# EAGLE board GPIO_Block-GiantPanel-v10 (EAGLE 6.6.0), part 1 of 5
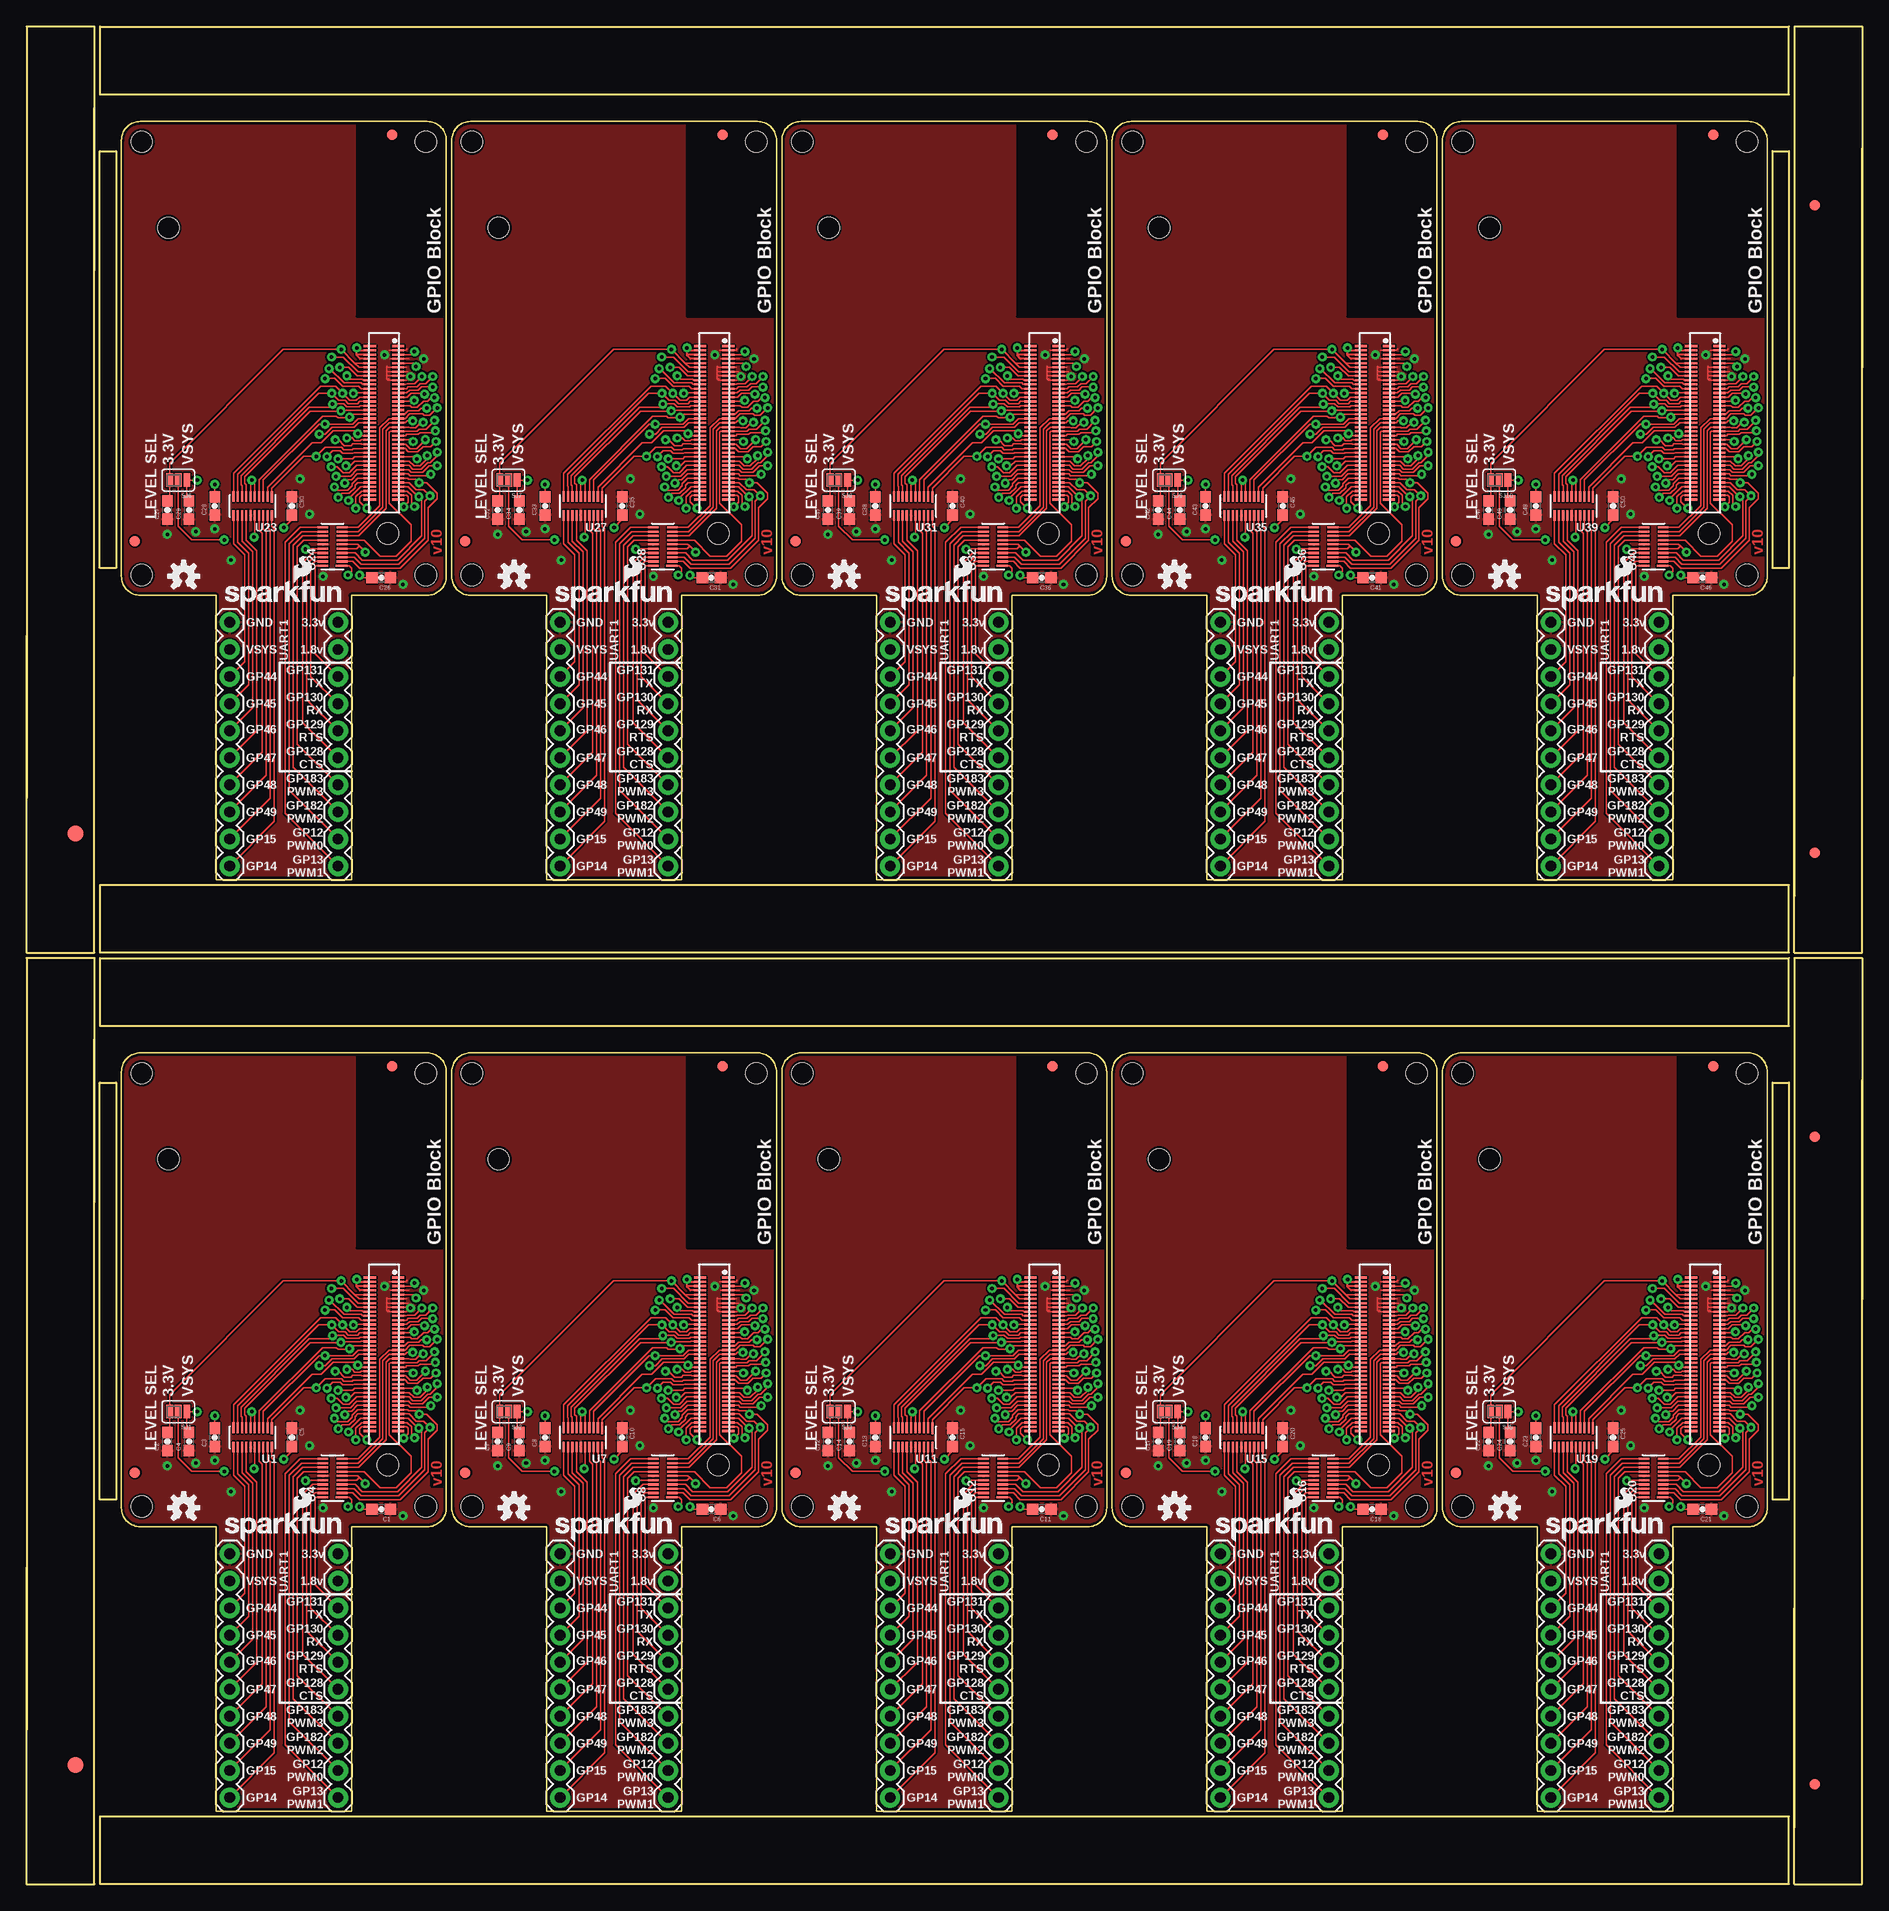
[diagram p0: board, top side]
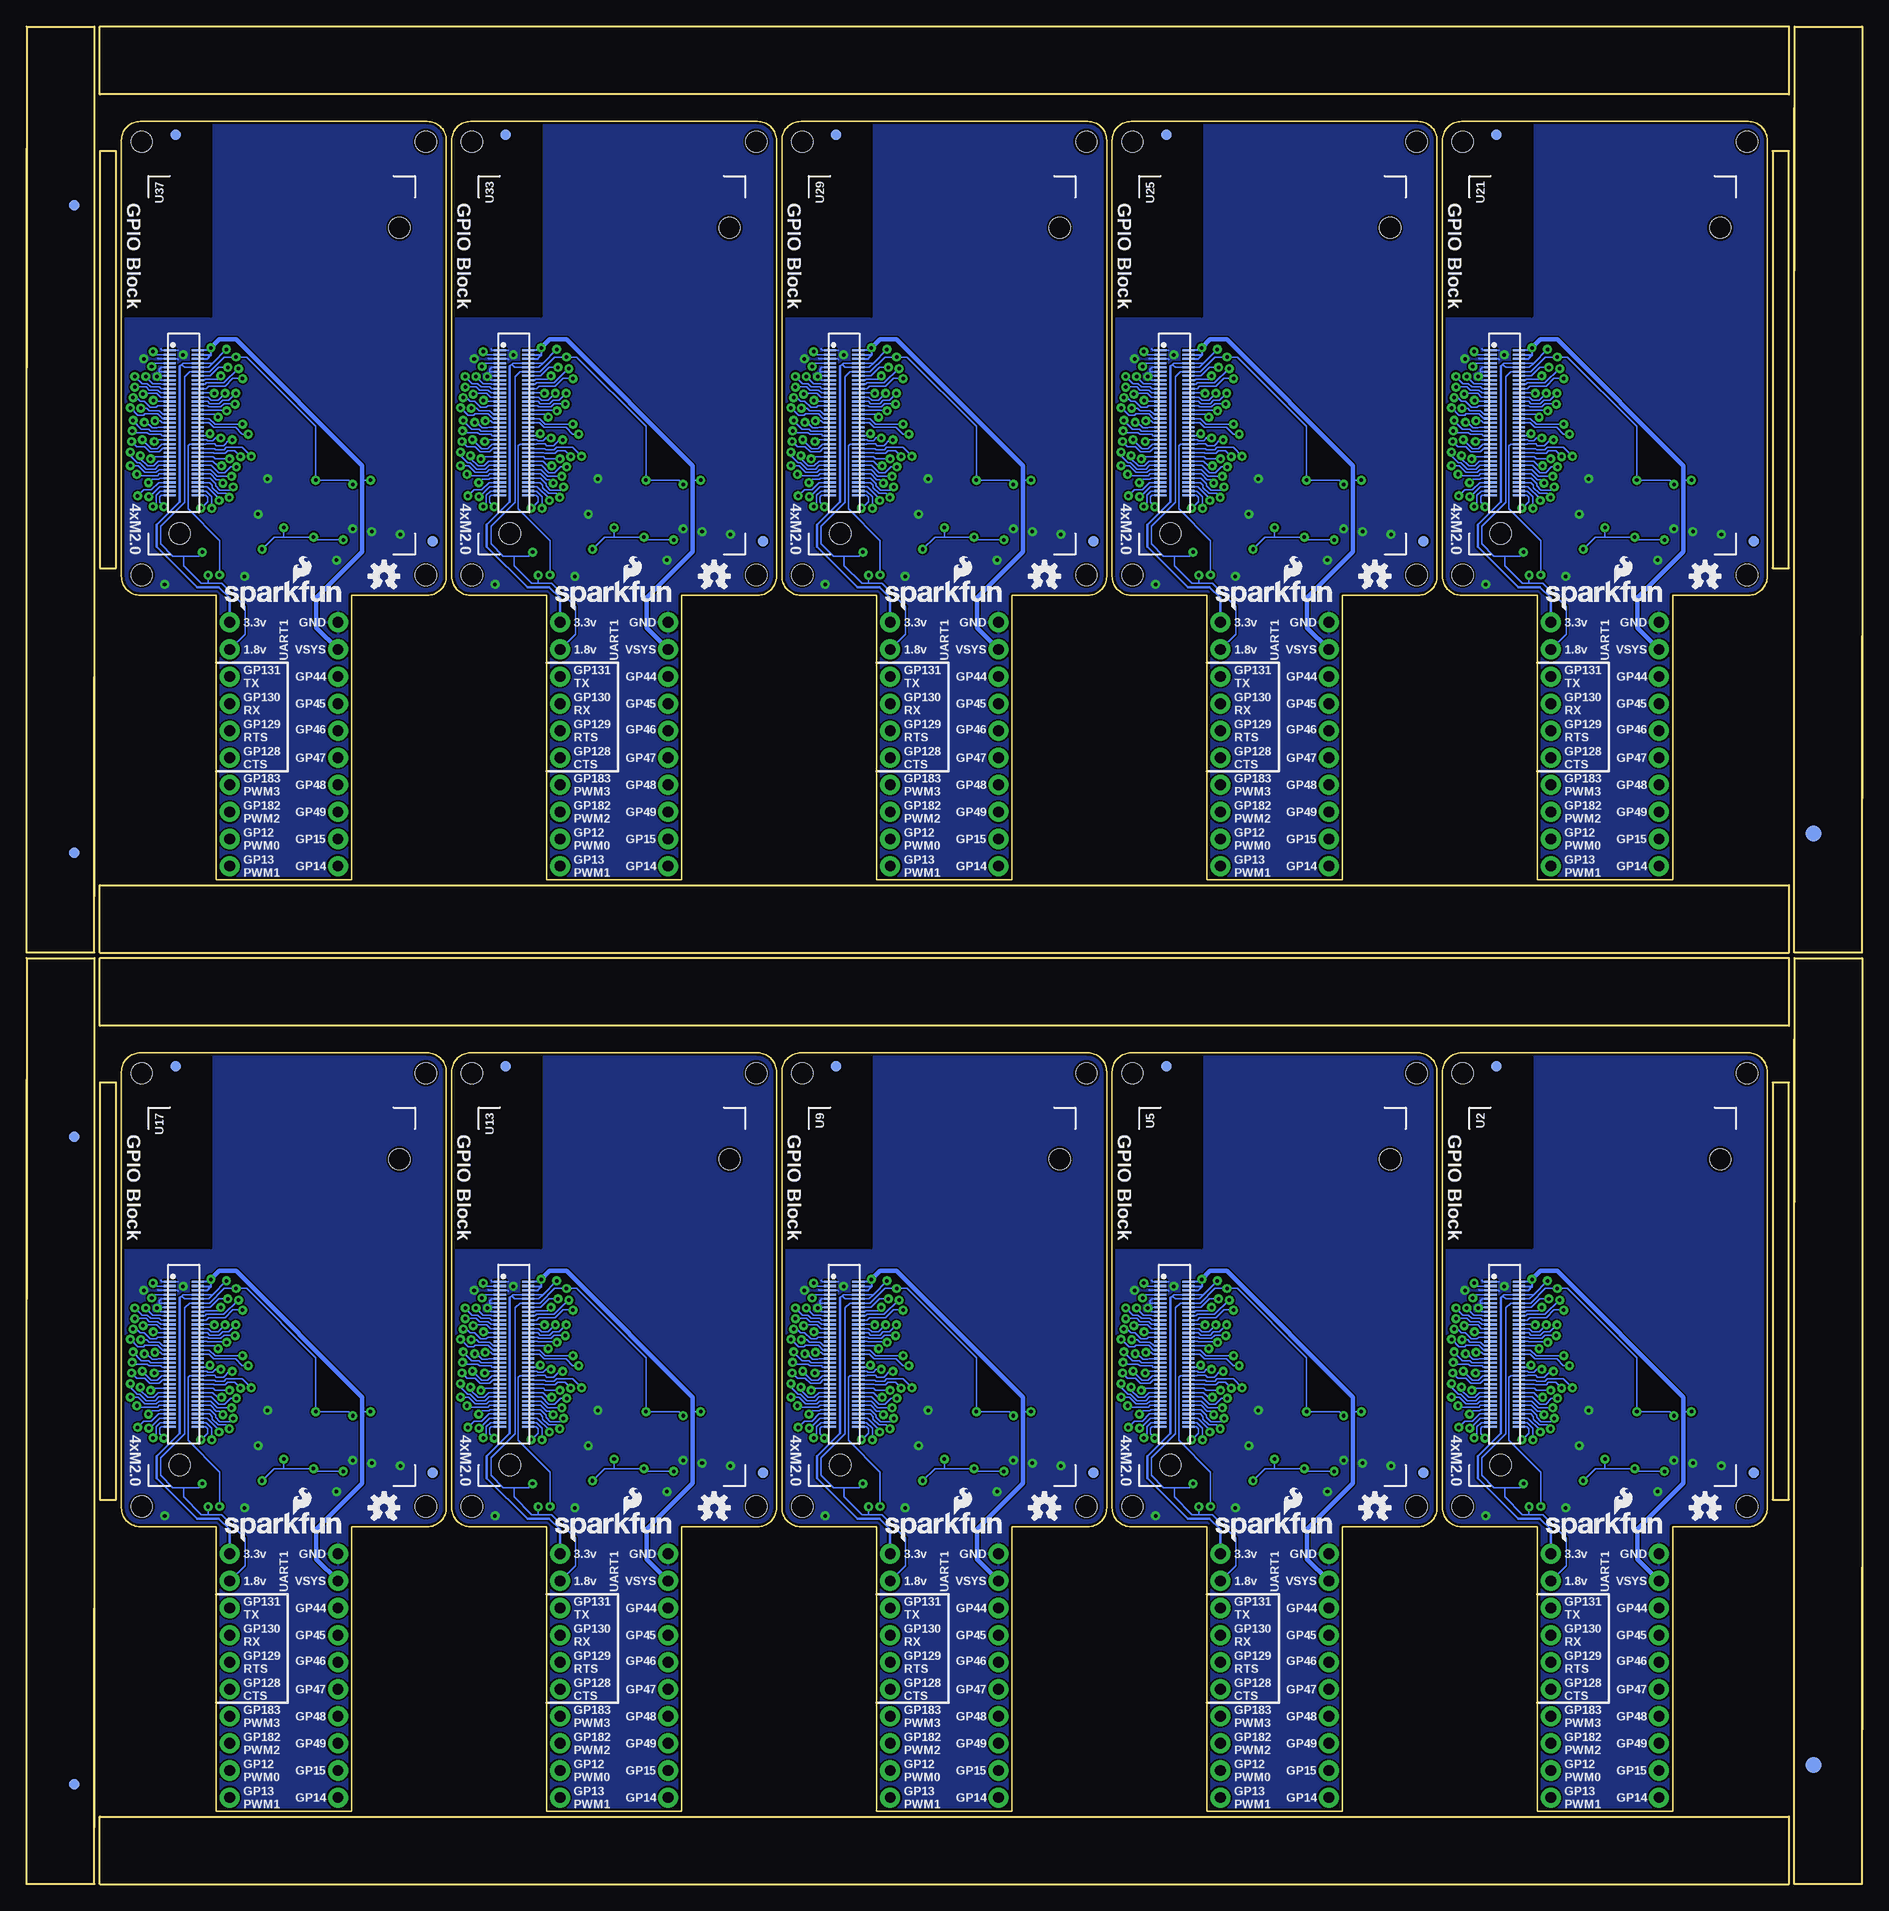
[diagram p1: board, bottom side, seen from below]

Size 172.21 x 174.24 mm. Coordinates in mm from the lower left corner, seen from the top.
Outline: 6.35,79.25 6.35,0 0,0 0,29.72
Outline: 172.21,75.44 172.21,0 165.86,0 165.86,25.91
Outline: 165.86,5.33 165.86,86.87 172.21,86.87 172.21,54.86
Outline: 0,14.48 0,86.87 6.35,86.87 6.35,64.01
Outline: 6.35,166.62 6.35,87.38 0,87.38 0,117.09
Outline: 172.21,162.81 172.21,87.38 165.86,87.38 165.86,113.28
Outline: 165.86,92.71 165.86,174.24 172.21,174.24 172.21,142.24
Outline: 0,101.85 0,174.24 6.35,174.24 6.35,151.38
Outline: 39.37,76.2 39.37,35.31 arc-90 37.59,33.53 30.48,33.53 30.48,6.86 17.78,6.86 17.78,33.53 10.67,33.53 arc-90 8.89,35.31 8.89,76.2 arc-90 10.67,77.98 37.59,77.98 arc-90 39.37,76.2
Outline: 70.36,76.2 70.36,35.31 arc-90 68.58,33.53 61.47,33.53 61.47,6.86 48.77,6.86 48.77,33.53 41.66,33.53 arc-90 39.88,35.31 39.88,76.2 arc-90 41.66,77.98 68.58,77.98 arc-90 70.36,76.2
Outline: 101.35,76.2 101.35,35.31 arc-90 99.57,33.53 92.46,33.53 92.46,6.86 79.76,6.86 79.76,33.53 72.64,33.53 arc-90 70.87,35.31 70.87,76.2 arc-90 72.64,77.98 99.57,77.98 arc-90 101.35,76.2
Outline: 132.33,76.2 132.33,35.31 arc-90 130.56,33.53 123.44,33.53 123.44,6.86 110.74,6.86 110.74,33.53 103.63,33.53 arc-90 101.85,35.31 101.85,76.2 arc-90 103.63,77.98 130.56,77.98 arc-90 132.33,76.2
Outline: 163.32,76.2 163.32,35.31 arc-90 161.54,33.53 154.43,33.53 154.43,6.86 141.73,6.86 141.73,33.53 134.62,33.53 arc-90 132.84,35.31 132.84,76.2 arc-90 134.62,77.98 161.54,77.98 arc-90 163.32,76.2
Outline: 6.86,6.35 6.86,0 165.35,0 165.35,6.35 6.86,6.35
Outline: 6.86,80.52 165.35,80.52 165.35,86.87 6.86,86.87 6.86,80.52
Outline: 6.86,36.07 6.86,75.18 8.38,75.18 8.38,36.07 6.86,36.07
Outline: 163.83,36.07 163.83,75.18 165.35,75.18 165.35,36.07 163.83,36.07
Outline: 39.37,163.58 39.37,122.68 arc-90 37.59,120.9 30.48,120.9 30.48,94.23 17.78,94.23 17.78,120.9 10.67,120.9 arc-90 8.89,122.68 8.89,163.58 arc-90 10.67,165.35 37.59,165.35 arc-90 39.37,163.58
Outline: 70.36,163.58 70.36,122.68 arc-90 68.58,120.9 61.47,120.9 61.47,94.23 48.77,94.23 48.77,120.9 41.66,120.9 arc-90 39.88,122.68 39.88,163.58 arc-90 41.66,165.35 68.58,165.35 arc-90 70.36,163.58
Outline: 101.35,163.58 101.35,122.68 arc-90 99.57,120.9 92.46,120.9 92.46,94.23 79.76,94.23 79.76,120.9 72.64,120.9 arc-90 70.87,122.68 70.87,163.58 arc-90 72.64,165.35 99.57,165.35 arc-90 101.35,163.58
Outline: 132.33,163.58 132.33,122.68 arc-90 130.56,120.9 123.44,120.9 123.44,94.23 110.74,94.23 110.74,120.9 103.63,120.9 arc-90 101.85,122.68 101.85,163.58 arc-90 103.63,165.35 130.56,165.35 arc-90 132.33,163.58
Outline: 163.32,163.58 163.32,122.68 arc-90 161.54,120.9 154.43,120.9 154.43,94.23 141.73,94.23 141.73,120.9 134.62,120.9 arc-90 132.84,122.68 132.84,163.58 arc-90 134.62,165.35 161.54,165.35 arc-90 163.32,163.58
Outline: 6.86,93.73 6.86,87.38 165.35,87.38 165.35,93.73 6.86,93.73
Outline: 6.86,167.89 165.35,167.89 165.35,174.24 6.86,174.24 6.86,167.89
Outline: 6.86,123.44 6.86,162.56 8.38,162.56 8.38,123.44 6.86,123.44
Outline: 163.83,123.44 163.83,162.56 165.35,162.56 165.35,123.44 163.83,123.44
Copper layers (1*16): Top 0.035mm / dielectric 1.5mm / Bottom 0.035mm
Design rules "SparkFun-2-layer *": minimum track width 6mil, minimum drill 13mil, track to track 6mil, track to pad 6mil, pad to pad 6mil, via to via 6mil, smd to smd 6mil, copper to edge 8mil, drill to drill 8mil, minimum pad ring 12mil, minimum via ring 10mil, stop-mask expansion 4mil, vias tented up to drill 20mil, thermal gap 6mil
Holes 2 mm at 37.47,35.43 10.79,35.43 10.79,76.07 37.47,76.07 68.45,35.43 41.78,35.43 41.78,76.07 68.45,76.07 99.44,35.43 72.77,35.43 72.77,76.07 99.44,76.07 130.43,35.43 103.76,35.43 103.76,76.07 130.43,76.07 161.42,35.43 134.75,35.43 134.75,76.07 161.42,76.07 37.47,122.81 10.79,122.81 10.79,163.45 37.47,163.45 68.45,122.81 41.78,122.81 41.78,163.45 68.45,163.45 99.44,122.81 72.77,122.81 72.77,163.45 99.44,163.45 130.43,122.81 103.76,122.81 103.76,163.45 130.43,163.45 161.42,122.81 134.75,122.81 134.75,163.45 161.42,163.45
tRestrict: area 31,59.7 to 39.4,78; area 62,59.7 to 70.4,78; area 93,59.7 to 101.3,78; area 124,59.7 to 132.3,78; area 154.9,59.7 to 163.3,78; area 31,147.1 to 39.4,165.4; area 62,147.1 to 70.4,165.4; area 93,147.1 to 101.3,165.4; area 124,147.1 to 132.3,165.4; area 154.9,147.1 to 163.3,165.4
bRestrict: area 31,59.7 to 39.4,78; area 62,59.7 to 70.4,78; area 93,59.7 to 101.3,78; area 124,59.7 to 132.3,78; area 154.9,59.7 to 163.3,78; area 31,147.1 to 39.4,165.4; area 62,147.1 to 70.4,165.4; area 93,147.1 to 101.3,165.4; area 124,147.1 to 132.3,165.4; area 154.9,147.1 to 163.3,165.4

## Footprints (pad centres in the part's own frame; a part is rotated, then mirrored left to right if it is on the bottom)
0603-CAP = smd 1.1 x 1: 1 -0.85,0; 2 0.85,0
FIDUCIAL-1.5X3 = smd 1.5 x 1.5: 1 0,0
FIDUCIAL-1X2 = smd 1 x 1: 1 0,0
1X10 = drill 1.016 pad 1.88: 1 0,0; 2 2.54,0; 3 5.08,0; 4 7.62,0; 5 10.16,0; 6 12.7,0; 7 15.24,0; 8 17.78,0; 9 20.32,0; 10 22.86,0
PAD-JUMPER-3-2OF3_NC_BY_PASTE_YES_SILK_FULL_BOX = smd 0.635 x 1.27: 1 -0.813,0; 2 0,0; 3 0.813,0
UFDFN-20 = smd 0.2 x 1.1: 1 -1.8,-0.85 | smd 0.2 x 1: 2 -1.4,-0.9; 3 -1,-0.9; 4 -0.6,-0.9; 5 -0.2,-0.9; 6 0.2,-0.9; 7 0.6,-0.9; 8 1,-0.9; 9 1.4,-0.9; 10 1.8,-0.9; 11 1.8,0.9; 12 1.4,0.9; 13 1,0.9; 14 0.6,0.9; 15 0.2,0.9; 16 -0.2,0.9; 17 -0.6,0.9; 18 -1,0.9; 19 -1.4,0.9; 20 -1.8,0.9
EDISON_DAUGHTER = smd 1.14 x 0.2: 1 1.98,19.17; 2 4.62,19.17; 3 1.98,18.77; 4 4.62,18.77; 5 1.98,18.37; 6 4.62,18.37; 7 1.98,17.97; 8 4.62,17.97; 9 1.98,17.57; 10 4.62,17.57; 11 1.98,17.17; 12 4.62,17.17; 13 1.98,16.77; 14 4.62,16.77; 15 1.98,16.37; 16 4.62,16.37; 17 1.98,15.97; 18 4.62,15.97; 19 1.98,15.57; 20 4.62,15.57; 21 1.98,15.17; 22 4.62,15.17; 23 1.98,14.77; 24 4.62,14.77; 25 1.98,14.37; 26 4.62,14.37; 27 1.98,13.97; 28 4.62,13.97; 29 1.98,13.57; 30 4.62,13.57; 31 1.98,13.17; 32 4.62,13.17; 33 1.98,12.77; 34 4.62,12.77; 35 1.98,12.37; 36 4.62,12.37; 37 1.98,11.97; 38 4.62,11.97; 39 1.98,11.57; 40 4.62,11.57; 41 1.98,11.17; 42 4.62,11.17; 43 1.98,10.77; 44 4.62,10.77; 45 1.98,10.37; 46 4.62,10.37; 47 1.98,9.97; 48 4.62,9.97; 49 1.98,9.57; 50 4.62,9.57; 51 1.98,9.17; 52 4.62,9.17; 53 1.98,8.77; 54 4.62,8.77; 55 1.98,8.37; 56 4.62,8.37; 57 1.98,7.97; 58 4.62,7.97; 59 1.98,7.57; 60 4.62,7.57; 61 1.98,7.17; 62 4.62,7.17; 63 1.98,6.77; 64 4.62,6.77; 65 1.98,6.37; 66 4.62,6.37; 67 1.98,5.97; 68 4.62,5.97; 69 1.98,5.57; 70 4.62,5.57 | hole 2: 23.53,30.67; 2.93,1.98
DF40C-70DP-0.4(51) = smd 0.2 x 1.14 bottom: 1 6.8,1.32; 2 6.8,-1.32; 3 6.4,1.32; 4 6.4,-1.32; 5 6,1.32; 6 6,-1.32; 7 5.6,1.32; 8 5.6,-1.32; 9 5.2,1.32; 10 5.2,-1.32; 11 4.8,1.32; 12 4.8,-1.32; 13 4.4,1.32; 14 4.4,-1.32; 15 4,1.32; 16 4,-1.32; 17 3.6,1.32; 18 3.6,-1.32; 19 3.2,1.32; 20 3.2,-1.32; 21 2.8,1.32; 22 2.8,-1.32; 23 2.4,1.32; 24 2.4,-1.32; 25 2,1.32; 26 2,-1.32; 27 1.6,1.32; 28 1.6,-1.32; 29 1.2,1.32; 30 1.2,-1.32; 31 0.8,1.32; 32 0.8,-1.32; 33 0.4,1.32; 34 0.4,-1.32; 35 0,1.32; 36 0,-1.32; 37 -0.4,1.32; 38 -0.4,-1.32; 39 -0.8,1.32; 40 -0.8,-1.32; 41 -1.2,1.32; 42 -1.2,-1.32; 43 -1.6,1.32; 44 -1.6,-1.32; 45 -2,1.32; 46 -2,-1.32; 47 -2.4,1.32; 48 -2.4,-1.32; 49 -2.8,1.32; 50 -2.8,-1.32; 51 -3.2,1.32; 52 -3.2,-1.32; 53 -3.6,1.32; 54 -3.6,-1.32; 55 -4,1.32; 56 -4,-1.32; 57 -4.4,1.32; 58 -4.4,-1.32; 59 -4.8,1.32; 60 -4.8,-1.32; 61 -5.2,1.32; 62 -5.2,-1.32; 63 -5.6,1.32; 64 -5.6,-1.32; 65 -6,1.32; 66 -6,-1.32; 67 -6.4,1.32; 68 -6.4,-1.32; 69 -6.8,1.32; 70 -6.8,-1.32; NC1 7.2,1.32; NC2 7.2,-1.32; NC3 -7.2,-1.32; NC4 -7.2,1.32

## Placement (x,y rotation side)
C1  0.1uF  [0603-CAP]  33.27,35.18 180 top
C2  0.1uF  [0603-CAP]  13.21,41.53 90 top
C3  0.1uF  [0603-CAP]  17.65,41.91 90 top
C4  0.1uF  [0603-CAP]  15.24,41.53 90 top
C5  0.1uF  [0603-CAP]  24.89,41.91 270 top
C6  0.1uF  [0603-CAP]  64.26,35.18 180 top
C7  0.1uF  [0603-CAP]  44.2,41.53 90 top
C8  0.1uF  [0603-CAP]  48.64,41.91 90 top
C9  0.1uF  [0603-CAP]  46.23,41.53 90 top
C10  0.1uF  [0603-CAP]  55.88,41.91 270 top
C11  0.1uF  [0603-CAP]  95.25,35.18 180 top
C12  0.1uF  [0603-CAP]  75.18,41.53 90 top
C13  0.1uF  [0603-CAP]  79.63,41.91 90 top
C14  0.1uF  [0603-CAP]  77.22,41.53 90 top
C15  0.1uF  [0603-CAP]  86.87,41.91 270 top
C16  0.1uF  [0603-CAP]  126.24,35.18 180 top
C17  0.1uF  [0603-CAP]  106.17,41.53 90 top
C18  0.1uF  [0603-CAP]  110.62,41.91 90 top
C19  0.1uF  [0603-CAP]  108.2,41.53 90 top
C20  0.1uF  [0603-CAP]  117.86,41.91 270 top
C21  0.1uF  [0603-CAP]  157.23,35.18 180 top
C22  0.1uF  [0603-CAP]  137.16,41.53 90 top
C23  0.1uF  [0603-CAP]  141.6,41.91 90 top
C24  0.1uF  [0603-CAP]  139.19,41.53 90 top
C25  0.1uF  [0603-CAP]  148.84,41.91 270 top
C26  0.1uF  [0603-CAP]  33.27,122.56 180 top
C27  0.1uF  [0603-CAP]  13.21,128.91 90 top
C28  0.1uF  [0603-CAP]  17.65,129.29 90 top
C29  0.1uF  [0603-CAP]  15.24,128.91 90 top
C30  0.1uF  [0603-CAP]  24.89,129.29 270 top
C31  0.1uF  [0603-CAP]  64.26,122.56 180 top
C32  0.1uF  [0603-CAP]  44.2,128.91 90 top
C33  0.1uF  [0603-CAP]  48.64,129.29 90 top
C34  0.1uF  [0603-CAP]  46.23,128.91 90 top
C35  0.1uF  [0603-CAP]  55.88,129.29 270 top
C36  0.1uF  [0603-CAP]  95.25,122.56 180 top
C37  0.1uF  [0603-CAP]  75.18,128.91 90 top
C38  0.1uF  [0603-CAP]  79.63,129.29 90 top
C39  0.1uF  [0603-CAP]  77.22,128.91 90 top
C40  0.1uF  [0603-CAP]  86.87,129.29 270 top
C41  0.1uF  [0603-CAP]  126.24,122.56 180 top
C42  0.1uF  [0603-CAP]  106.17,128.91 90 top
C43  0.1uF  [0603-CAP]  110.62,129.29 90 top
C44  0.1uF  [0603-CAP]  108.2,128.91 90 top
C45  0.1uF  [0603-CAP]  117.86,129.29 270 top
C46  0.1uF  [0603-CAP]  157.23,122.56 180 top
C47  0.1uF  [0603-CAP]  137.16,128.91 90 top
C48  0.1uF  [0603-CAP]  141.6,129.29 90 top
C49  0.1uF  [0603-CAP]  139.19,128.91 90 top
C50  0.1uF  [0603-CAP]  148.84,129.29 270 top
E$1  [FIDUCIAL-1.5X3]  4.57,11.18 0 top
E$2  [FIDUCIAL-1.5X3]  4.57,11.18 0 bottom
E$3  [FIDUCIAL-1X2]  167.77,70.1 180 bottom
E$4  [FIDUCIAL-1X2]  167.77,9.4 0 top
E$5  [FIDUCIAL-1X2]  167.77,70.1 180 top
E$6  [FIDUCIAL-1X2]  167.77,9.4 0 bottom
E$7  [FIDUCIAL-1X2]  167.77,96.77 0 top
E$8  [FIDUCIAL-1X2]  167.77,157.48 180 top
E$9  [FIDUCIAL-1.5X3]  4.57,98.55 0 top
E$10  [FIDUCIAL-1.5X3]  4.57,98.55 0 bottom
E$11  [FIDUCIAL-1X2]  167.77,157.48 180 bottom
E$12  [FIDUCIAL-1X2]  167.77,96.77 0 bottom
FID1  FIDUCIAL1X2  [FIDUCIAL-1X2]  10.16,38.61 0 top
FID2  FIDUCIAL1X2  [FIDUCIAL-1X2]  34.29,76.71 0 top
FID3  FIDUCIAL1X2  [FIDUCIAL-1X2]  10.16,38.61 0 bottom
FID4  FIDUCIAL1X2  [FIDUCIAL-1X2]  34.29,76.71 0 bottom
FID5  FIDUCIAL1X2  [FIDUCIAL-1X2]  41.15,38.61 0 top
FID6  FIDUCIAL1X2  [FIDUCIAL-1X2]  65.28,76.71 0 top
FID7  FIDUCIAL1X2  [FIDUCIAL-1X2]  41.15,38.61 0 bottom
FID8  FIDUCIAL1X2  [FIDUCIAL-1X2]  65.28,76.71 0 bottom
FID9  FIDUCIAL1X2  [FIDUCIAL-1X2]  72.14,38.61 0 top
FID10  FIDUCIAL1X2  [FIDUCIAL-1X2]  96.27,76.71 0 top
FID11  FIDUCIAL1X2  [FIDUCIAL-1X2]  72.14,38.61 0 bottom
FID12  FIDUCIAL1X2  [FIDUCIAL-1X2]  96.27,76.71 0 bottom
FID13  FIDUCIAL1X2  [FIDUCIAL-1X2]  103.12,38.61 0 top
FID14  FIDUCIAL1X2  [FIDUCIAL-1X2]  127.25,76.71 0 top
FID15  FIDUCIAL1X2  [FIDUCIAL-1X2]  103.12,38.61 0 bottom
FID16  FIDUCIAL1X2  [FIDUCIAL-1X2]  127.25,76.71 0 bottom
FID17  FIDUCIAL1X2  [FIDUCIAL-1X2]  134.11,38.61 0 top
FID18  FIDUCIAL1X2  [FIDUCIAL-1X2]  158.24,76.71 0 top
FID19  FIDUCIAL1X2  [FIDUCIAL-1X2]  134.11,38.61 0 bottom
FID20  FIDUCIAL1X2  [FIDUCIAL-1X2]  158.24,76.71 0 bottom
FID21  FIDUCIAL1X2  [FIDUCIAL-1X2]  10.16,125.98 0 top
FID22  FIDUCIAL1X2  [FIDUCIAL-1X2]  34.29,164.08 0 top
FID23  FIDUCIAL1X2  [FIDUCIAL-1X2]  10.16,125.98 0 bottom
FID24  FIDUCIAL1X2  [FIDUCIAL-1X2]  34.29,164.08 0 bottom
FID25  FIDUCIAL1X2  [FIDUCIAL-1X2]  41.15,125.98 0 top
FID26  FIDUCIAL1X2  [FIDUCIAL-1X2]  65.28,164.08 0 top
FID27  FIDUCIAL1X2  [FIDUCIAL-1X2]  41.15,125.98 0 bottom
FID28  FIDUCIAL1X2  [FIDUCIAL-1X2]  65.28,164.08 0 bottom
FID29  FIDUCIAL1X2  [FIDUCIAL-1X2]  72.14,125.98 0 top
FID30  FIDUCIAL1X2  [FIDUCIAL-1X2]  96.27,164.08 0 top
FID31  FIDUCIAL1X2  [FIDUCIAL-1X2]  72.14,125.98 0 bottom
FID32  FIDUCIAL1X2  [FIDUCIAL-1X2]  96.27,164.08 0 bottom
FID33  FIDUCIAL1X2  [FIDUCIAL-1X2]  103.12,125.98 0 top
FID34  FIDUCIAL1X2  [FIDUCIAL-1X2]  127.25,164.08 0 top
FID35  FIDUCIAL1X2  [FIDUCIAL-1X2]  103.12,125.98 0 bottom
FID36  FIDUCIAL1X2  [FIDUCIAL-1X2]  127.25,164.08 0 bottom
FID37  FIDUCIAL1X2  [FIDUCIAL-1X2]  134.11,125.98 0 top
FID38  FIDUCIAL1X2  [FIDUCIAL-1X2]  158.24,164.08 0 top
FID39  FIDUCIAL1X2  [FIDUCIAL-1X2]  134.11,125.98 0 bottom
FID40  FIDUCIAL1X2  [FIDUCIAL-1X2]  158.24,164.08 0 bottom
JP1  M10"  [1X10]  29.21,8.13 90 top
JP2  M10"  [1X10]  19.05,8.13 90 top
JP3  M10"  [1X10]  60.2,8.13 90 top
JP4  M10"  [1X10]  50.04,8.13 90 top
JP5  M10"  [1X10]  91.19,8.13 90 top
JP6  M10"  [1X10]  81.03,8.13 90 top
JP7  M10"  [1X10]  122.17,8.13 90 top
JP8  M10"  [1X10]  112.01,8.13 90 top
JP9  M10"  [1X10]  153.16,8.13 90 top
JP10  M10"  [1X10]  143,8.13 90 top
JP11  M10"  [1X10]  29.21,95.5 90 top
JP12  M10"  [1X10]  19.05,95.5 90 top
JP13  M10"  [1X10]  60.2,95.5 90 top
JP14  M10"  [1X10]  50.04,95.5 90 top
JP15  M10"  [1X10]  91.19,95.5 90 top
JP16  M10"  [1X10]  81.03,95.5 90 top
JP17  M10"  [1X10]  122.17,95.5 90 top
JP18  M10"  [1X10]  112.01,95.5 90 top
JP19  M10"  [1X10]  153.16,95.5 90 top
JP20  M10"  [1X10]  143,95.5 90 top
LOGO1  OSHW-LOGOS  [OSHW-LOGO-S]  14.73,35.31 0 top
LOGO2  OSHW-LOGOS  [OSHW-LOGO-S]  14.73,35.31 0 bottom
LOGO3  SFE_LOGO_NAME_FLAME.1_INCH  [SFE_LOGO_NAME_FLAME_.1]  30.1,32 0 bottom
LOGO4  SFE_LOGO_NAME_FLAME.1_INCH  [SFE_LOGO_NAME_FLAME_.1]  18.19,32 0 top
LOGO5  OSHW-LOGOS  [OSHW-LOGO-S]  45.72,35.31 0 bottom
LOGO6  SFE_LOGO_NAME_FLAME.1_INCH  [SFE_LOGO_NAME_FLAME_.1]  61.09,32 0 bottom
LOGO7  OSHW-LOGOS  [OSHW-LOGO-S]  45.72,35.31 0 top
LOGO8  SFE_LOGO_NAME_FLAME.1_INCH  [SFE_LOGO_NAME_FLAME_.1]  49.17,32 0 top
LOGO9  OSHW-LOGOS  [OSHW-LOGO-S]  76.71,35.31 0 bottom
LOGO10  SFE_LOGO_NAME_FLAME.1_INCH  [SFE_LOGO_NAME_FLAME_.1]  92.08,32 0 bottom
LOGO11  OSHW-LOGOS  [OSHW-LOGO-S]  76.71,35.31 0 top
LOGO12  SFE_LOGO_NAME_FLAME.1_INCH  [SFE_LOGO_NAME_FLAME_.1]  80.16,32 0 top
LOGO13  OSHW-LOGOS  [OSHW-LOGO-S]  107.7,35.31 0 bottom
LOGO14  SFE_LOGO_NAME_FLAME.1_INCH  [SFE_LOGO_NAME_FLAME_.1]  123.06,32 0 bottom
LOGO15  OSHW-LOGOS  [OSHW-LOGO-S]  107.7,35.31 0 top
LOGO16  SFE_LOGO_NAME_FLAME.1_INCH  [SFE_LOGO_NAME_FLAME_.1]  111.15,32 0 top
LOGO17  OSHW-LOGOS  [OSHW-LOGO-S]  138.68,35.31 0 bottom
LOGO18  SFE_LOGO_NAME_FLAME.1_INCH  [SFE_LOGO_NAME_FLAME_.1]  154.05,32 0 bottom
LOGO19  OSHW-LOGOS  [OSHW-LOGO-S]  138.68,35.31 0 top
LOGO20  SFE_LOGO_NAME_FLAME.1_INCH  [SFE_LOGO_NAME_FLAME_.1]  142.14,32 0 top
LOGO21  OSHW-LOGOS  [OSHW-LOGO-S]  14.73,122.68 0 bottom
LOGO22  SFE_LOGO_NAME_FLAME.1_INCH  [SFE_LOGO_NAME_FLAME_.1]  30.1,119.38 0 bottom
LOGO23  OSHW-LOGOS  [OSHW-LOGO-S]  14.73,122.68 0 top
LOGO24  SFE_LOGO_NAME_FLAME.1_INCH  [SFE_LOGO_NAME_FLAME_.1]  18.19,119.38 0 top
LOGO25  OSHW-LOGOS  [OSHW-LOGO-S]  45.72,122.68 0 bottom
LOGO26  SFE_LOGO_NAME_FLAME.1_INCH  [SFE_LOGO_NAME_FLAME_.1]  61.09,119.38 0 bottom
LOGO27  OSHW-LOGOS  [OSHW-LOGO-S]  45.72,122.68 0 top
LOGO28  SFE_LOGO_NAME_FLAME.1_INCH  [SFE_LOGO_NAME_FLAME_.1]  49.17,119.38 0 top
LOGO29  OSHW-LOGOS  [OSHW-LOGO-S]  76.71,122.68 0 bottom
LOGO30  SFE_LOGO_NAME_FLAME.1_INCH  [SFE_LOGO_NAME_FLAME_.1]  92.08,119.38 0 bottom
LOGO31  OSHW-LOGOS  [OSHW-LOGO-S]  76.71,122.68 0 top
LOGO32  SFE_LOGO_NAME_FLAME.1_INCH  [SFE_LOGO_NAME_FLAME_.1]  80.16,119.38 0 top
LOGO33  OSHW-LOGOS  [OSHW-LOGO-S]  107.7,122.68 0 bottom
LOGO34  SFE_LOGO_NAME_FLAME.1_INCH  [SFE_LOGO_NAME_FLAME_.1]  123.06,119.38 0 bottom
LOGO35  OSHW-LOGOS  [OSHW-LOGO-S]  107.7,122.68 0 top
LOGO36  SFE_LOGO_NAME_FLAME.1_INCH  [SFE_LOGO_NAME_FLAME_.1]  111.15,119.38 0 top
LOGO37  OSHW-LOGOS  [OSHW-LOGO-S]  138.68,122.68 0 bottom
LOGO38  SFE_LOGO_NAME_FLAME.1_INCH  [SFE_LOGO_NAME_FLAME_.1]  154.05,119.38 0 bottom
LOGO39  OSHW-LOGOS  [OSHW-LOGO-S]  138.68,122.68 0 top
LOGO40  SFE_LOGO_NAME_FLAME.1_INCH  [SFE_LOGO_NAME_FLAME_.1]  142.14,119.38 0 top
SJ1  GPIO Reference Select  [PAD-JUMPER-3-2OF3_NC_BY_PASTE_YES_SILK_FULL_BOX]  14.22,44.32 180 top
SJ2  GPIO Reference Select  [PAD-JUMPER-3-2OF3_NC_BY_PASTE_YES_SILK_FULL_BOX]  45.21,44.32 180 top
SJ3  GPIO Reference Select  [PAD-JUMPER-3-2OF3_NC_BY_PASTE_YES_SILK_FULL_BOX]  76.2,44.32 180 top
SJ4  GPIO Reference Select  [PAD-JUMPER-3-2OF3_NC_BY_PASTE_YES_SILK_FULL_BOX]  107.19,44.32 180 top
SJ5  GPIO Reference Select  [PAD-JUMPER-3-2OF3_NC_BY_PASTE_YES_SILK_FULL_BOX]  138.18,44.32 180 top
SJ6  GPIO Reference Select  [PAD-JUMPER-3-2OF3_NC_BY_PASTE_YES_SILK_FULL_BOX]  14.22,131.7 180 top
SJ7  GPIO Reference Select  [PAD-JUMPER-3-2OF3_NC_BY_PASTE_YES_SILK_FULL_BOX]  45.21,131.7 180 top
SJ8  GPIO Reference Select  [PAD-JUMPER-3-2OF3_NC_BY_PASTE_YES_SILK_FULL_BOX]  76.2,131.7 180 top
SJ9  GPIO Reference Select  [PAD-JUMPER-3-2OF3_NC_BY_PASTE_YES_SILK_FULL_BOX]  107.19,131.7 180 top
SJ10  GPIO Reference Select  [PAD-JUMPER-3-2OF3_NC_BY_PASTE_YES_SILK_FULL_BOX]  138.18,131.7 180 top
U1  TXB0108  [UFDFN-20]  21.21,41.91 180 top
U2  EDISON_CONNECTOR_FULLMOUNTING_HOLES  [EDISON_DAUGHTER]  36.83,37.34 0 bottom
U3  EDISON_CONNECTOR_FULLHEADER  [DF40C-70DP-0.4(51)]  33.53,49.71 90 bottom
U4  TXB0108  [UFDFN-20]  28.7,38.1 90 top
U5  EDISON_CONNECTOR_FULLMOUNTING_HOLES  [EDISON_DAUGHTER]  67.82,37.34 0 bottom
U6  EDISON_CONNECTOR_FULLHEADER  [DF40C-70DP-0.4(51)]  64.52,49.71 90 bottom
U7  TXB0108  [UFDFN-20]  52.2,41.91 180 top
U8  TXB0108  [UFDFN-20]  59.69,38.1 90 top
U9  EDISON_CONNECTOR_FULLMOUNTING_HOLES  [EDISON_DAUGHTER]  98.81,37.34 0 bottom
U10  EDISON_CONNECTOR_FULLHEADER  [DF40C-70DP-0.4(51)]  95.51,49.71 90 bottom
U11  TXB0108  [UFDFN-20]  83.19,41.91 180 top
U12  TXB0108  [UFDFN-20]  90.68,38.1 90 top
U13  EDISON_CONNECTOR_FULLMOUNTING_HOLES  [EDISON_DAUGHTER]  129.79,37.34 0 bottom
U14  EDISON_CONNECTOR_FULLHEADER  [DF40C-70DP-0.4(51)]  126.49,49.71 90 bottom
U15  TXB0108  [UFDFN-20]  114.17,41.91 180 top
U16  TXB0108  [UFDFN-20]  121.67,38.1 90 top
U17  EDISON_CONNECTOR_FULLMOUNTING_HOLES  [EDISON_DAUGHTER]  160.78,37.34 0 bottom
U18  EDISON_CONNECTOR_FULLHEADER  [DF40C-70DP-0.4(51)]  157.48,49.71 90 bottom
U19  TXB0108  [UFDFN-20]  145.16,41.91 180 top
U20  TXB0108  [UFDFN-20]  152.65,38.1 90 top
U21  EDISON_CONNECTOR_FULLMOUNTING_HOLES  [EDISON_DAUGHTER]  36.83,124.71 0 bottom
U22  EDISON_CONNECTOR_FULLHEADER  [DF40C-70DP-0.4(51)]  33.53,137.08 90 bottom
U23  TXB0108  [UFDFN-20]  21.21,129.29 180 top
U24  TXB0108  [UFDFN-20]  28.7,125.48 90 top
U25  EDISON_CONNECTOR_FULLMOUNTING_HOLES  [EDISON_DAUGHTER]  67.82,124.71 0 bottom
U26  EDISON_CONNECTOR_FULLHEADER  [DF40C-70DP-0.4(51)]  64.52,137.08 90 bottom
U27  TXB0108  [UFDFN-20]  52.2,129.29 180 top
U28  TXB0108  [UFDFN-20]  59.69,125.48 90 top
U29  EDISON_CONNECTOR_FULLMOUNTING_HOLES  [EDISON_DAUGHTER]  98.81,124.71 0 bottom
U30  EDISON_CONNECTOR_FULLHEADER  [DF40C-70DP-0.4(51)]  95.51,137.08 90 bottom
U31  TXB0108  [UFDFN-20]  83.19,129.29 180 top
U32  TXB0108  [UFDFN-20]  90.68,125.48 90 top
U33  EDISON_CONNECTOR_FULLMOUNTING_HOLES  [EDISON_DAUGHTER]  129.79,124.71 0 bottom
U34  EDISON_CONNECTOR_FULLHEADER  [DF40C-70DP-0.4(51)]  126.49,137.08 90 bottom
U35  TXB0108  [UFDFN-20]  114.17,129.29 180 top
U36  TXB0108  [UFDFN-20]  121.67,125.48 90 top
U37  EDISON_CONNECTOR_FULLMOUNTING_HOLES  [EDISON_DAUGHTER]  160.78,124.71 0 bottom
U38  EDISON_CONNECTOR_FULLHEADER  [DF40C-70DP-0.4(51)]  157.48,137.08 90 bottom
U39  TXB0108  [UFDFN-20]  145.16,129.29 180 top
U40  TXB0108  [UFDFN-20]  152.65,125.48 90 top

## Library data of the parts
C1-C50 = SparkFun-Capacitors; PROD_ID: CAP-00810
E$1 E$2 E$9 E$10 = SparkFun-Retired
E$3-E$8 E$11 E$12 FID1-FID40 LOGO1-LOGO40 = SparkFun-Aesthetics
JP1-JP20 = SparkFun-Connectors
SJ1-SJ10 = SparkFun-Passives
U1 U4 U7 U8 U11 U12 U15 U16 U19 U20 U23 U24 U27 U28 U31 U32 U35 U36 U39 U40 = Testing; PROD_ID: IC-12292
U2 U3 U5 U6 U9 U10 U13 U14 U17 U18 U21 U22 U25 U26 U29 U30 U33 U34 U37 U38 = Edison

## Nets
1.8V: C1.2 C3.2 JP1.9 U1.5 U1.6 U2.12 U3.12 U4.5 U4.6
1.8V1: C6.2 C8.2 JP3.9 U5.12 U6.12 U7.5 U7.6 U8.5 U8.6
1.8V2: C11.2 C13.2 JP5.9 U9.12 U10.12 U11.5 U11.6 U12.5 U12.6
1.8V3: C16.2 C18.2 JP7.9 U13.12 U14.12 U15.5 U15.6 U16.5 U16.6
1.8V4: C21.2 C23.2 JP9.9 U17.12 U18.12 U19.5 U19.6 U20.5 U20.6
1.8V5: C26.2 C28.2 JP11.9 U21.12 U22.12 U23.5 U23.6 U24.5 U24.6
1.8V6: C31.2 C33.2 JP13.9 U25.12 U26.12 U27.5 U27.6 U28.5 U28.6
1.8V7: C36.2 C38.2 JP15.9 U29.12 U30.12 U31.5 U31.6 U32.5 U32.6
1.8V8: C41.2 C43.2 JP17.9 U33.12 U34.12 U35.5 U35.6 U36.5 U36.6
1.8V9: C46.2 C48.2 JP19.9 U37.12 U38.12 U39.5 U39.6 U40.5 U40.6
3.3V: C2.2 JP1.10 SJ1.3 U2.8 U2.10 U3.8 U3.10
3.3V1: C7.2 JP3.10 SJ2.3 U5.8 U5.10 U6.8 U6.10
3.3V2: C12.2 JP5.10 SJ3.3 U9.8 U9.10 U10.8 U10.10
3.3V3: C17.2 JP7.10 SJ4.3 U13.8 U13.10 U14.8 U14.10
3.3V4: C22.2 JP9.10 SJ5.3 U17.8 U17.10 U18.8 U18.10
3.3V5: C27.2 JP11.10 SJ6.3 U21.8 U21.10 U22.8 U22.10
3.3V6: C32.2 JP13.10 SJ7.3 U25.8 U25.10 U26.8 U26.10
3.3V7: C37.2 JP15.10 SJ8.3 U29.8 U29.10 U30.8 U30.10
3.3V8: C42.2 JP17.10 SJ9.3 U33.8 U33.10 U34.8 U34.10
3.3V9: C47.2 JP19.10 SJ10.3 U37.8 U37.10 U38.8 U38.10
DCIN: U2.14 U3.14
DCIN1: U5.14 U6.14
DCIN2: U9.14 U10.14
DCIN3: U13.14 U14.14
DCIN4: U17.14 U18.14
DCIN5: U21.14 U22.14
DCIN6: U25.14 U26.14
DCIN7: U29.14 U30.14
DCIN8: U33.14 U34.14
DCIN9: U37.14 U38.14
FAULT: U2.19 U3.19
FAULT1: U5.19 U6.19
FAULT2: U9.19 U10.19
FAULT3: U13.19 U14.19
FAULT4: U17.19 U18.19
FAULT5: U21.19 U22.19
FAULT6: U25.19 U26.19
FAULT7: U29.19 U30.19
FAULT8: U33.19 U34.19
FAULT9: U37.19 U38.19
FW_RCVR: U2.69 U3.69
FW_RCVR1: U5.69 U6.69
FW_RCVR2: U9.69 U10.69
FW_RCVR3: U13.69 U14.69
FW_RCVR4: U17.69 U18.69
FW_RCVR5: U21.69 U22.69
FW_RCVR6: U25.69 U26.69
FW_RCVR7: U29.69 U30.69
FW_RCVR8: U33.69 U34.69
FW_RCVR9: U37.69 U38.69
GND: C1.1 C2.1 C3.1 C4.1 C5.1 JP2.10 U1.15 U2.1 U2.5 U2.9 U2.11 U2.13 U2.15 U3.1 U3.5 U3.9 U3.11 U3.13 U3.15 U4.15
GND1: C6.1 C7.1 C8.1 C9.1 C10.1 JP4.10 U5.1 U5.5 U5.9 U5.11 U5.13 U5.15 U6.1 U6.5 U6.9 U6.11 U6.13 U6.15 U7.15 U8.15
GND2: C11.1 C12.1 C13.1 C14.1 C15.1 JP6.10 U9.1 U9.5 U9.9 U9.11 U9.13 U9.15 U10.1 U10.5 U10.9 U10.11 U10.13 U10.15 U11.15 U12.15
GND3: C16.1 C17.1 C18.1 C19.1 C20.1 JP8.10 U13.1 U13.5 U13.9 U13.11 U13.13 U13.15 U14.1 U14.5 U14.9 U14.11 U14.13 U14.15 U15.15 U16.15
GND4: C21.1 C22.1 C23.1 C24.1 C25.1 JP10.10 U17.1 U17.5 U17.9 U17.11 U17.13 U17.15 U18.1 U18.5 U18.9 U18.11 U18.13 U18.15 U19.15 U20.15
GND5: C26.1 C27.1 C28.1 C29.1 C30.1 JP12.10 U21.1 U21.5 U21.9 U21.11 U21.13 U21.15 U22.1 U22.5 U22.9 U22.11 U22.13 U22.15 U23.15 U24.15
GND6: C31.1 C32.1 C33.1 C34.1 C35.1 JP14.10 U25.1 U25.5 U25.9 U25.11 U25.13 U25.15 U26.1 U26.5 U26.9 U26.11 U26.13 U26.15 U27.15 U28.15
GND7: C36.1 C37.1 C38.1 C39.1 C40.1 JP16.10 U29.1 U29.5 U29.9 U29.11 U29.13 U29.15 U30.1 U30.5 U30.9 U30.11 U30.13 U30.15 U31.15 U32.15
GND8: C41.1 C42.1 C43.1 C44.1 C45.1 JP18.10 U33.1 U33.5 U33.9 U33.11 U33.13 U33.15 U34.1 U34.5 U34.9 U34.11 U34.13 U34.15 U35.15 U36.15
GND9: C46.1 C47.1 C48.1 C49.1 C50.1 JP20.10 U37.1 U37.5 U37.9 U37.11 U37.13 U37.15 U38.1 U38.5 U38.9 U38.11 U38.13 U38.15 U39.15 U40.15
GP1: U5.48 U6.48 U7.1
GP2: U5.42 U6.42 U7.2
GP3: U5.34 U6.34 U7.3
GP4: U5.32 U6.32 U7.4
GP5: U5.30 U6.30 U7.7
GP6: U5.28 U6.28 U7.8
GP7: U5.26 U6.26 U7.9
GP8: U5.25 U6.25
GP9: U5.24 U6.24 U7.10
GP10: U9.48 U10.48 U11.1
GP11: U9.42 U10.42 U11.2
GP12: U9.34 U10.34 U11.3
GP12_PWM0: U2.35 U3.35 U4.9
GP12_PWM1: U5.35 U6.35 U8.9
GP12_PWM2: U9.35 U10.35 U12.9
GP12_PWM3: U13.35 U14.35 U16.9
GP12_PWM4: U17.35 U18.35 U20.9
GP12_PWM5: U21.35 U22.35 U24.9
GP12_PWM6: U25.35 U26.35 U28.9
GP12_PWM7: U29.35 U30.35 U32.9
GP12_PWM8: U33.35 U34.35 U36.9
GP12_PWM9: U37.35 U38.35 U40.9
GP13: U9.32 U10.32 U11.4
GP13_PWM1: U2.33 U3.33 U4.10
GP13_PWM2: U5.33 U6.33 U8.10
GP13_PWM3: U9.33 U10.33 U12.10
GP13_PWM4: U13.33 U14.33 U16.10
GP13_PWM5: U17.33 U18.33 U20.10
GP13_PWM6: U21.33 U22.33 U24.10
GP13_PWM7: U25.33 U26.33 U28.10
GP13_PWM8: U29.33 U30.33 U32.10
GP13_PWM9: U33.33 U34.33 U36.10
GP13_PWM10: U37.33 U38.33 U40.10
GP14: U1.1 U2.48 U3.48
GP15: U1.2 U2.42 U3.42
GP16: U9.30 U10.30 U11.7
GP17: U9.28 U10.28 U11.8
GP18: U9.26 U10.26 U11.9
GP19: U9.25 U10.25
GP19_I2C_1_SCL: U2.41 U3.41
GP19_I2C_1_SCL1: U5.41 U6.41
GP19_I2C_1_SCL2: U9.41 U10.41
GP19_I2C_1_SCL3: U13.41 U14.41
GP19_I2C_1_SCL4: U17.41 U18.41
GP19_I2C_1_SCL5: U21.41 U22.41
GP19_I2C_1_SCL6: U25.41 U26.41
GP19_I2C_1_SCL7: U29.41 U30.41
GP19_I2C_1_SCL8: U33.41 U34.41
GP19_I2C_1_SCL9: U37.41 U38.41
GP20: U9.24 U10.24 U11.10
GP20_I2C_1_SDA: U2.43 U3.43
GP20_I2C_1_SDA1: U5.43 U6.43
GP20_I2C_1_SDA2: U9.43 U10.43
GP20_I2C_1_SDA3: U13.43 U14.43
GP20_I2C_1_SDA4: U17.43 U18.43
GP20_I2C_1_SDA5: U21.43 U22.43
GP20_I2C_1_SDA6: U25.43 U26.43
GP20_I2C_1_SDA7: U29.43 U30.43
GP20_I2C_1_SDA8: U33.43 U34.43
GP20_I2C_1_SDA9: U37.43 U38.43
GP21: U13.48 U14.48 U15.1
GP22: U13.42 U14.42 U15.2
GP23: U13.34 U14.34 U15.3
GP24: U13.32 U14.32 U15.4
GP25: U13.30 U14.30 U15.7
GP26: U13.28 U14.28 U15.8
GP27: U13.26 U14.26 U15.9
GP27_I2C_6_SCL: U2.45 U3.45
GP27_I2C_6_SCL1: U5.45 U6.45
GP27_I2C_6_SCL2: U9.45 U10.45
GP27_I2C_6_SCL3: U13.45 U14.45
GP27_I2C_6_SCL4: U17.45 U18.45
GP27_I2C_6_SCL5: U21.45 U22.45
GP27_I2C_6_SCL6: U25.45 U26.45
GP27_I2C_6_SCL7: U29.45 U30.45
GP27_I2C_6_SCL8: U33.45 U34.45
GP27_I2C_6_SCL9: U37.45 U38.45
GP28: U13.25 U14.25
GP28_I2C_6_SDA: U2.47 U3.47
GP28_I2C_6_SDA1: U5.47 U6.47
GP28_I2C_6_SDA2: U9.47 U10.47
GP28_I2C_6_SDA3: U13.47 U14.47
GP28_I2C_6_SDA4: U17.47 U18.47
GP28_I2C_6_SDA5: U21.47 U22.47
GP28_I2C_6_SDA6: U25.47 U26.47
GP28_I2C_6_SDA7: U29.47 U30.47
GP28_I2C_6_SDA8: U33.47 U34.47
GP28_I2C_6_SDA9: U37.47 U38.47
GP29: U13.24 U14.24 U15.10
GP30: U17.48 U18.48 U19.1
GP31: U17.42 U18.42 U19.2
GP32: U17.34 U18.34 U19.3
GP33: U17.32 U18.32 U19.4
GP34: U17.30 U18.30 U19.7
GP35: U17.28 U18.28 U19.8
GP36: U17.26 U18.26 U19.9
GP37: U17.25 U18.25
GP38: U17.24 U18.24 U19.10
GP39: U21.48 U22.48 U23.1
GP40: U21.42 U22.42 U23.2
GP40_I2S_2_CLK: U2.52 U3.52
GP40_I2S_2_CLK1: U5.52 U6.52
GP40_I2S_2_CLK2: U9.52 U10.52
GP40_I2S_2_CLK3: U13.52 U14.52
GP40_I2S_2_CLK4: U17.52 U18.52
GP40_I2S_2_CLK5: U21.52 U22.52
GP40_I2S_2_CLK6: U25.52 U26.52
GP40_I2S_2_CLK7: U29.52 U30.52
GP40_I2S_2_CLK8: U33.52 U34.52
GP40_I2S_2_CLK9: U37.52 U38.52
GP41: U21.34 U22.34 U23.3
GP41_I2S_2_FS: U2.54 U3.54
GP41_I2S_2_FS1: U5.54 U6.54
GP41_I2S_2_FS2: U9.54 U10.54
GP41_I2S_2_FS3: U13.54 U14.54
GP41_I2S_2_FS4: U17.54 U18.54
GP41_I2S_2_FS5: U21.54 U22.54
GP41_I2S_2_FS6: U25.54 U26.54
GP41_I2S_2_FS7: U29.54 U30.54
GP41_I2S_2_FS8: U33.54 U34.54
GP41_I2S_2_FS9: U37.54 U38.54
GP42: U21.32 U22.32 U23.4
GP42_I2S_2_RXD: U2.50 U3.50
GP42_I2S_2_RXD1: U5.50 U6.50
GP42_I2S_2_RXD2: U9.50 U10.50
GP42_I2S_2_RXD3: U13.50 U14.50
GP42_I2S_2_RXD4: U17.50 U18.50
GP42_I2S_2_RXD5: U21.50 U22.50
GP42_I2S_2_RXD6: U25.50 U26.50
GP42_I2S_2_RXD7: U29.50 U30.50
GP42_I2S_2_RXD8: U33.50 U34.50
GP42_I2S_2_RXD9: U37.50 U38.50
GP43: U21.30 U22.30 U23.7
GP43_I2S_2_TXD: U2.56 U3.56
GP43_I2S_2_TXD1: U5.56 U6.56
GP43_I2S_2_TXD2: U9.56 U10.56
GP43_I2S_2_TXD3: U13.56 U14.56
GP43_I2S_2_TXD4: U17.56 U18.56
GP43_I2S_2_TXD5: U21.56 U22.56
GP43_I2S_2_TXD6: U25.56 U26.56
GP43_I2S_2_TXD7: U29.56 U30.56
GP43_I2S_2_TXD8: U33.56 U34.56
GP43_I2S_2_TXD9: U37.56 U38.56
GP44: U1.10 U2.24 U3.24
GP45: U1.9 U2.26 U3.26
GP46: U1.8 U2.28 U3.28
GP47: U1.7 U2.30 U3.30
GP48: U1.4 U2.32 U3.32
GP49: U1.3 U2.34 U3.34
GP50: U21.28 U22.28 U23.8
GP51: U21.26 U22.26 U23.9
GP52: U21.25 U22.25
GP53: U21.24 U22.24 U23.10
GP54: U25.48 U26.48 U27.1
GP55: U25.42 U26.42 U27.2
GP56: U25.34 U26.34 U27.3
GP57: U25.32 U26.32 U27.4
GP58: U25.30 U26.30 U27.7
GP59: U25.28 U26.28 U27.8
GP60: U25.26 U26.26 U27.9
GP61: U25.25 U26.25
GP62: U25.24 U26.24 U27.10
GP63: U29.48 U30.48 U31.1
GP64: U29.42 U30.42 U31.2
GP65: U29.34 U30.34 U31.3
GP66: U29.32 U30.32 U31.4
GP67: U29.30 U30.30 U31.7
GP68: U29.28 U30.28 U31.8
GP69: U29.26 U30.26 U31.9
GP70: U29.25 U30.25
GP71: U29.24 U30.24 U31.10
GP72: U33.48 U34.48 U35.1
GP73: U33.42 U34.42 U35.2
GP74: U33.34 U34.34 U35.3
GP75: U33.32 U34.32 U35.4
GP76: U33.30 U34.30 U35.7
GP77: U33.28 U34.28 U35.8
GP77_SD_0_CD#: U2.60 U3.60
GP77_SD_0_CD#1: U5.60 U6.60
GP77_SD_0_CD#2: U9.60 U10.60
GP77_SD_0_CD#3: U13.60 U14.60
GP77_SD_0_CD#4: U17.60 U18.60
GP77_SD_0_CD#5: U21.60 U22.60
GP77_SD_0_CD#6: U25.60 U26.60
GP77_SD_0_CD#7: U29.60 U30.60
GP77_SD_0_CD#8: U33.60 U34.60
GP77_SD_0_CD#9: U37.60 U38.60
GP78: U33.26 U34.26 U35.9
GP78_SD_0_CLK: U2.58 U3.58
GP78_SD_0_CLK1: U5.58 U6.58
GP78_SD_0_CLK2: U9.58 U10.58
GP78_SD_0_CLK3: U13.58 U14.58
GP78_SD_0_CLK4: U17.58 U18.58
GP78_SD_0_CLK5: U21.58 U22.58
GP78_SD_0_CLK6: U25.58 U26.58
GP78_SD_0_CLK7: U29.58 U30.58
GP78_SD_0_CLK8: U33.58 U34.58
GP78_SD_0_CLK9: U37.58 U38.58
GP79: U33.25 U34.25
GP79_SD_0_CMD: U2.62 U3.62
GP79_SD_0_CMD1: U5.62 U6.62
GP79_SD_0_CMD2: U9.62 U10.62
GP79_SD_0_CMD3: U13.62 U14.62
GP79_SD_0_CMD4: U17.62 U18.62
GP79_SD_0_CMD5: U21.62 U22.62
GP79_SD_0_CMD6: U25.62 U26.62
GP79_SD_0_CMD7: U29.62 U30.62
GP79_SD_0_CMD8: U33.62 U34.62
GP79_SD_0_CMD9: U37.62 U38.62
GP80: U33.24 U34.24 U35.10
GP80_SD_0_DAT0: U2.66 U3.66
GP80_SD_0_DAT1: U5.66 U6.66
GP80_SD_0_DAT2: U9.66 U10.66
GP80_SD_0_DAT3: U13.66 U14.66
GP80_SD_0_DAT4: U17.66 U18.66
GP80_SD_0_DAT5: U21.66 U22.66
GP80_SD_0_DAT6: U25.66 U26.66
GP80_SD_0_DAT7: U29.66 U30.66
GP80_SD_0_DAT8: U33.66 U34.66
GP80_SD_0_DAT9: U37.66 U38.66
GP81: U37.48 U38.48 U39.1
GP81_SD_0_DAT1: U2.70 U3.70
GP81_SD_0_DAT2: U5.70 U6.70
GP81_SD_0_DAT3: U9.70 U10.70
GP81_SD_0_DAT4: U13.70 U14.70
GP81_SD_0_DAT5: U17.70 U18.70
GP81_SD_0_DAT6: U21.70 U22.70
GP81_SD_0_DAT7: U25.70 U26.70
GP81_SD_0_DAT8: U29.70 U30.70
GP81_SD_0_DAT9: U33.70 U34.70
GP81_SD_0_DAT10: U37.70 U38.70
GP82: U37.42 U38.42 U39.2
GP82_SD_0_DAT1: U5.64 U6.64
GP82_SD_0_DAT2: U2.64 U3.64
GP82_SD_0_DAT3: U9.64 U10.64
GP82_SD_0_DAT4: U13.64 U14.64
GP82_SD_0_DAT5: U17.64 U18.64
GP82_SD_0_DAT6: U21.64 U22.64
GP82_SD_0_DAT7: U25.64 U26.64
GP82_SD_0_DAT8: U29.64 U30.64
GP82_SD_0_DAT9: U33.64 U34.64
GP82_SD_0_DAT10: U37.64 U38.64
GP83: U37.34 U38.34 U39.3
GP83_SD_0_DAT1: U5.68 U6.68
GP83_SD_0_DAT2: U9.68 U10.68
GP83_SD_0_DAT3: U2.68 U3.68
GP83_SD_0_DAT4: U13.68 U14.68
GP83_SD_0_DAT5: U17.68 U18.68
GP83_SD_0_DAT6: U21.68 U22.68
GP83_SD_0_DAT7: U25.68 U26.68
GP83_SD_0_DAT8: U29.68 U30.68
GP83_SD_0_DAT9: U33.68 U34.68
GP83_SD_0_DAT10: U37.68 U38.68
GP84: U37.32 U38.32 U39.4
GP84_SD_CLK_FB: U2.44 U3.44
GP84_SD_CLK_FB1: U5.44 U6.44
GP84_SD_CLK_FB2: U9.44 U10.44
GP84_SD_CLK_FB3: U13.44 U14.44
GP84_SD_CLK_FB4: U17.44 U18.44
GP84_SD_CLK_FB5: U21.44 U22.44
GP84_SD_CLK_FB6: U25.44 U26.44
GP84_SD_CLK_FB7: U29.44 U30.44
GP84_SD_CLK_FB8: U33.44 U34.44
GP84_SD_CLK_FB9: U37.44 U38.44
GP85: U37.30 U38.30 U39.7
GP86: U37.28 U38.28 U39.8
GP87: U37.26 U38.26 U39.9
GP88: U37.25 U38.25
GP89: U37.24 U38.24 U39.10
GP109_SPI_2_CLK: U2.55 U3.55
GP109_SPI_2_CLK1: U5.55 U6.55
GP109_SPI_2_CLK2: U9.55 U10.55
GP109_SPI_2_CLK3: U13.55 U14.55
GP109_SPI_2_CLK4: U17.55 U18.55
GP109_SPI_2_CLK5: U21.55 U22.55
GP109_SPI_2_CLK6: U25.55 U26.55
GP109_SPI_2_CLK7: U29.55 U30.55
GP109_SPI_2_CLK8: U33.55 U34.55
GP109_SPI_2_CLK9: U37.55 U38.55
GP110_SPI_2_FS0: U2.53 U3.53
GP110_SPI_2_FS1: U5.53 U6.53
GP110_SPI_2_FS2: U9.53 U10.53
GP110_SPI_2_FS3: U13.53 U14.53
GP110_SPI_2_FS4: U17.53 U18.53
GP110_SPI_2_FS5: U21.53 U22.53
GP110_SPI_2_FS6: U25.53 U26.53
GP110_SPI_2_FS7: U29.53 U30.53
GP110_SPI_2_FS8: U33.53 U34.53
GP110_SPI_2_FS9: U37.53 U38.53
GP111_SPI_2_FS1: U2.51 U3.51
GP111_SPI_2_FS2: U5.51 U6.51
GP111_SPI_2_FS3: U9.51 U10.51
GP111_SPI_2_FS4: U13.51 U14.51
GP111_SPI_2_FS5: U17.51 U18.51
GP111_SPI_2_FS6: U21.51 U22.51
GP111_SPI_2_FS7: U25.51 U26.51
GP111_SPI_2_FS8: U29.51 U30.51
GP111_SPI_2_FS9: U33.51 U34.51
GP111_SPI_2_FS10: U37.51 U38.51
GP114_SPI_2_RXD: U2.59 U3.59
GP114_SPI_2_RXD1: U5.59 U6.59
GP114_SPI_2_RXD2: U9.59 U10.59
GP114_SPI_2_RXD3: U13.59 U14.59
GP114_SPI_2_RXD4: U17.59 U18.59
GP114_SPI_2_RXD5: U21.59 U22.59
GP114_SPI_2_RXD6: U25.59 U26.59
GP114_SPI_2_RXD7: U29.59 U30.59
GP114_SPI_2_RXD8: U33.59 U34.59
GP114_SPI_2_RXD9: U37.59 U38.59
GP115_SPI_2_TXD: U2.57 U3.57
GP115_SPI_2_TXD1: U5.57 U6.57
GP115_SPI_2_TXD2: U9.57 U10.57
GP115_SPI_2_TXD3: U13.57 U14.57
GP115_SPI_2_TXD4: U17.57 U18.57
GP115_SPI_2_TXD5: U21.57 U22.57
GP115_SPI_2_TXD6: U25.57 U26.57
GP115_SPI_2_TXD7: U29.57 U30.57
GP115_SPI_2_TXD8: U33.57 U34.57
GP115_SPI_2_TXD9: U37.57 U38.57
GP128_UART_1_CTS: U2.65 U3.65 U4.4
GP128_UART_1_CTS1: U5.65 U6.65 U8.4
GP128_UART_1_CTS2: U9.65 U10.65 U12.4
GP128_UART_1_CTS3: U13.65 U14.65 U16.4
GP128_UART_1_CTS4: U17.65 U18.65 U20.4
GP128_UART_1_CTS5: U21.65 U22.65 U24.4
GP128_UART_1_CTS6: U25.65 U26.65 U28.4
GP128_UART_1_CTS7: U29.65 U30.65 U32.4
GP128_UART_1_CTS8: U33.65 U34.65 U36.4
GP128_UART_1_CTS9: U37.65 U38.65 U40.4
GP129_UART_1_RTS: U2.63 U3.63 U4.3
GP129_UART_1_RTS1: U5.63 U6.63 U8.3
GP129_UART_1_RTS2: U9.63 U10.63 U12.3
GP129_UART_1_RTS3: U13.63 U14.63 U16.3
GP129_UART_1_RTS4: U17.63 U18.63 U20.3
GP129_UART_1_RTS5: U21.63 U22.63 U24.3
GP129_UART_1_RTS6: U25.63 U26.63 U28.3
GP129_UART_1_RTS7: U29.63 U30.63 U32.3
GP129_UART_1_RTS8: U33.63 U34.63 U36.3
GP129_UART_1_RTS9: U37.63 U38.63 U40.3
GP130_UART_1_RX: U2.61 U3.61 U4.2
GP130_UART_1_RX1: U5.61 U6.61 U8.2
GP130_UART_1_RX2: U9.61 U10.61 U12.2
GP130_UART_1_RX3: U13.61 U14.61 U16.2
GP130_UART_1_RX4: U17.61 U18.61 U20.2
GP130_UART_1_RX5: U21.61 U22.61 U24.2
GP130_UART_1_RX6: U25.61 U26.61 U28.2
GP130_UART_1_RX7: U29.61 U30.61 U32.2
GP130_UART_1_RX8: U33.61 U34.61 U36.2
GP130_UART_1_RX9: U37.61 U38.61 U40.2
GP131_UART_1_TX: U2.46 U3.46 U4.1
GP131_UART_1_TX1: U5.46 U6.46 U8.1
GP131_UART_1_TX2: U9.46 U10.46 U12.1
GP131_UART_1_TX3: U13.46 U14.46 U16.1
GP131_UART_1_TX4: U17.46 U18.46 U20.1
GP131_UART_1_TX5: U21.46 U22.46 U24.1
GP131_UART_1_TX6: U25.46 U26.46 U28.1
GP131_UART_1_TX7: U29.46 U30.46 U32.1
GP131_UART_1_TX8: U33.46 U34.46 U36.1
GP131_UART_1_TX9: U37.46 U38.46 U40.1
GP134_UART_2_RX: U2.22 U3.22
GP134_UART_2_RX1: U5.22 U6.22
GP134_UART_2_RX2: U9.22 U10.22
GP134_UART_2_RX3: U13.22 U14.22
GP134_UART_2_RX4: U17.22 U18.22
GP134_UART_2_RX5: U21.22 U22.22
GP134_UART_2_RX6: U25.22 U26.22
GP134_UART_2_RX7: U29.22 U30.22
GP134_UART_2_RX8: U33.22 U34.22
GP134_UART_2_RX9: U37.22 U38.22
GP135_UART_2_TX: U2.27 U3.27
GP135_UART_2_TX1: U5.27 U6.27
GP135_UART_2_TX2: U9.27 U10.27
GP135_UART_2_TX3: U13.27 U14.27
GP135_UART_2_TX4: U17.27 U18.27
GP135_UART_2_TX5: U21.27 U22.27
GP135_UART_2_TX6: U25.27 U26.27
GP135_UART_2_TX7: U29.27 U30.27
GP135_UART_2_TX8: U33.27 U34.27
GP135_UART_2_TX9: U37.27 U38.27
GP165: U2.25 U3.25
GP182_PWM1: U5.37 U6.37 U8.8
GP182_PWM2: U2.37 U3.37 U4.8
GP182_PWM3: U9.37 U10.37 U12.8
GP182_PWM4: U13.37 U14.37 U16.8
GP182_PWM5: U17.37 U18.37 U20.8
GP182_PWM6: U21.37 U22.37 U24.8
GP182_PWM7: U25.37 U26.37 U28.8
GP182_PWM8: U29.37 U30.37 U32.8
GP182_PWM9: U33.37 U34.37 U36.8
GP182_PWM10: U37.37 U38.37 U40.8
GP183_PWM1: U5.39 U6.39 U8.7
GP183_PWM2: U9.39 U10.39 U12.7
GP183_PWM3: U2.39 U3.39 U4.7
GP183_PWM4: U13.39 U14.39 U16.7
GP183_PWM5: U17.39 U18.39 U20.7
GP183_PWM6: U21.39 U22.39 U24.7
GP183_PWM7: U25.39 U26.39 U28.7
GP183_PWM8: U29.39 U30.39 U32.7
GP183_PWM9: U33.39 U34.39 U36.7
GP183_PWM10: U37.39 U38.39 U40.7
GPIO_REFERENCE_SELECT: C5.2 SJ1.2 U1.16 U4.16
GPIO_REFERENCE_SELECT1: C10.2 SJ2.2 U7.16 U8.16
GPIO_REFERENCE_SELECT2: C15.2 SJ3.2 U11.16 U12.16
GPIO_REFERENCE_SELECT3: C20.2 SJ4.2 U15.16 U16.16
GPIO_REFERENCE_SELECT4: C25.2 SJ5.2 U19.16 U20.16
GPIO_REFERENCE_SELECT5: C30.2 SJ6.2 U23.16 U24.16
GPIO_REFERENCE_SELECT6: C35.2 SJ7.2 U27.16 U28.16
GPIO_REFERENCE_SELECT7: C40.2 SJ8.2 U31.16 U32.16
GPIO_REFERENCE_SELECT8: C45.2 SJ9.2 U35.16 U36.16
GPIO_REFERENCE_SELECT9: C50.2 SJ10.2 U39.16 U40.16
MSIC_SLP_CLK: U2.7 U3.7
MSIC_SLP_CLK1: U5.7 U6.7
MSIC_SLP_CLK2: U9.7 U10.7
MSIC_SLP_CLK3: U13.7 U14.7
MSIC_SLP_CLK4: U17.7 U18.7
MSIC_SLP_CLK5: U21.7 U22.7
MSIC_SLP_CLK6: U25.7 U26.7
MSIC_SLP_CLK7: U29.7 U30.7
MSIC_SLP_CLK8: U33.7 U34.7
MSIC_SLP_CLK9: U37.7 U38.7
N$1: JP2.8 U1.11
N$2: JP2.7 U1.12
N$3: JP2.6 U1.13
N$4: JP2.5 U1.14
N$5: JP2.4 U1.17
N$6: JP2.3 U1.18
N$7: JP2.2 U1.19
N$8: JP2.1 U1.20
N$9: JP4.8 U7.11
N$10: JP4.7 U7.12
N$11: JP1.4 U4.14
N$12: JP1.3 U4.13
N$13: JP1.2 U4.12
N$14: JP1.1 U4.11
N$15: JP1.5 U4.17
N$16: JP1.6 U4.18
N$17: JP1.7 U4.19
N$18: JP1.8 U4.20
N$19: JP4.6 U7.13
N$20: JP4.5 U7.14
N$21: JP4.4 U7.17
N$22: JP4.3 U7.18
N$23: JP4.2 U7.19
N$24: JP4.1 U7.20
N$25: JP3.5 U8.17
N$26: JP3.6 U8.18
N$27: JP3.7 U8.19
N$28: JP3.8 U8.20
N$29: JP3.4 U8.14
N$30: JP3.3 U8.13
N$31: JP3.2 U8.12
N$32: JP3.1 U8.11
N$33: JP6.8 U11.11
N$34: JP6.7 U11.12
N$35: JP6.6 U11.13
N$36: JP6.5 U11.14
N$37: JP6.4 U11.17
N$38: JP6.3 U11.18
N$39: JP6.2 U11.19
N$40: JP6.1 U11.20
N$41: JP5.5 U12.17
N$42: JP5.6 U12.18
N$43: JP5.7 U12.19
N$44: JP5.8 U12.20
N$45: JP5.4 U12.14
N$46: JP5.3 U12.13
N$47: JP5.2 U12.12
N$48: JP5.1 U12.11
N$49: JP8.8 U15.11
N$50: JP8.7 U15.12
N$51: JP8.6 U15.13
N$52: JP8.5 U15.14
N$53: JP8.4 U15.17
N$54: JP8.3 U15.18
N$55: JP8.2 U15.19
N$56: JP8.1 U15.20
N$57: JP7.5 U16.17
N$58: JP7.6 U16.18
N$59: JP7.7 U16.19
N$60: JP7.8 U16.20
N$61: JP7.4 U16.14
N$62: JP7.3 U16.13
N$63: JP7.2 U16.12
N$64: JP7.1 U16.11
N$65: JP10.8 U19.11
N$66: JP10.7 U19.12
N$67: JP10.6 U19.13
N$68: JP10.5 U19.14
N$69: JP10.4 U19.17
N$70: JP10.3 U19.18
N$71: JP10.2 U19.19
N$72: JP10.1 U19.20
N$73: JP9.5 U20.17
N$74: JP9.6 U20.18
N$75: JP9.7 U20.19
N$76: JP9.8 U20.20
N$77: JP9.4 U20.14
N$78: JP9.3 U20.13
N$79: JP9.2 U20.12
N$80: JP9.1 U20.11
N$81: JP12.8 U23.11
N$82: JP12.7 U23.12
N$83: JP12.6 U23.13
N$84: JP12.5 U23.14
N$85: JP12.4 U23.17
N$86: JP12.3 U23.18
N$87: JP12.2 U23.19
N$88: JP12.1 U23.20
N$89: JP11.5 U24.17
N$90: JP11.6 U24.18
N$91: JP11.7 U24.19
N$92: JP11.8 U24.20
N$93: JP11.4 U24.14
N$94: JP11.3 U24.13
N$95: JP11.2 U24.12
N$96: JP11.1 U24.11
N$97: JP14.8 U27.11
N$98: JP14.7 U27.12
N$99: JP14.6 U27.13
N$100: JP14.5 U27.14
N$101: JP14.4 U27.17
N$102: JP14.3 U27.18
N$103: JP14.2 U27.19
N$104: JP14.1 U27.20
N$105: JP13.5 U28.17
N$106: JP13.6 U28.18
N$107: JP13.7 U28.19
N$108: JP13.8 U28.20
N$109: JP13.4 U28.14
N$110: JP13.3 U28.13
N$111: JP13.2 U28.12
N$112: JP13.1 U28.11
N$113: JP16.8 U31.11
N$114: JP16.7 U31.12
N$115: JP16.6 U31.13
N$116: JP16.5 U31.14
N$117: JP16.4 U31.17
N$118: JP16.3 U31.18
N$119: JP16.2 U31.19
N$120: JP16.1 U31.20
N$121: JP15.5 U32.17
N$122: JP15.6 U32.18
N$123: JP15.7 U32.19
N$124: JP15.8 U32.20
N$125: JP15.4 U32.14
N$126: JP15.3 U32.13
N$127: JP15.2 U32.12
N$128: JP15.1 U32.11
N$129: JP18.8 U35.11
N$130: JP18.7 U35.12
N$131: JP18.6 U35.13
N$132: JP18.5 U35.14
N$133: JP18.4 U35.17
N$134: JP18.3 U35.18
N$135: JP18.2 U35.19
N$136: JP18.1 U35.20
N$137: JP17.5 U36.17
N$138: JP17.6 U36.18
N$139: JP17.7 U36.19
N$140: JP17.8 U36.20
N$141: JP17.4 U36.14
N$142: JP17.3 U36.13
N$143: JP17.2 U36.12
N$144: JP17.1 U36.11
N$145: JP20.8 U39.11
N$146: JP20.7 U39.12
N$147: JP20.6 U39.13
N$148: JP20.5 U39.14
N$149: JP20.4 U39.17
N$150: JP20.3 U39.18
N$151: JP20.2 U39.19
N$152: JP20.1 U39.20
N$153: JP19.5 U40.17
N$154: JP19.6 U40.18
N$155: JP19.7 U40.19
N$156: JP19.8 U40.20
N$157: JP19.4 U40.14
N$158: JP19.3 U40.13
N$159: JP19.2 U40.12
N$160: JP19.1 U40.11
OSC_CLK_OUT: U2.67 U3.67
OSC_CLK_OUT1: U5.67 U6.67
OSC_CLK_OUT2: U9.67 U10.67
OSC_CLK_OUT3: U13.67 U14.67
OSC_CLK_OUT4: U17.67 U18.67
OSC_CLK_OUT5: U21.67 U22.67
OSC_CLK_OUT6: U25.67 U26.67
OSC_CLK_OUT7: U29.67 U30.67
OSC_CLK_OUT8: U33.67 U34.67
OSC_CLK_OUT9: U37.67 U38.67
PSW: U2.21 U3.21
PSW1: U5.21 U6.21
PSW2: U9.21 U10.21
PSW3: U13.21 U14.21
PSW4: U17.21 U18.21
PSW5: U21.21 U22.21
PSW6: U25.21 U26.21
PSW7: U29.21 U30.21
PSW8: U33.21 U34.21
PSW9: U37.21 U38.21
PWRBTN#: U2.17 U3.17
PWRBTN#1: U5.17 U6.17
PWRBTN#2: U9.17 U10.17
PWRBTN#3: U13.17 U14.17
PWRBTN#4: U17.17 U18.17
PWRBTN#5: U21.17 U22.17
PWRBTN#6: U25.17 U26.17
PWRBTN#7: U29.17 U30.17
PWRBTN#8: U33.17 U34.17
PWRBTN#9: U37.17 U38.17
RCVR_MODE: U2.31 U3.31
RCVR_MODE1: U5.31 U6.31
RCVR_MODE2: U9.31 U10.31
RCVR_MODE3: U13.31 U14.31
RCVR_MODE4: U17.31 U18.31
RCVR_MODE5: U21.31 U22.31
RCVR_MODE6: U25.31 U26.31
RCVR_MODE7: U29.31 U30.31
RCVR_MODE8: U33.31 U34.31
RCVR_MODE9: U37.31 U38.31
RESET_OUT#: U2.36 U3.36
RESET_OUT#1: U5.36 U6.36
RESET_OUT#2: U9.36 U10.36
RESET_OUT#3: U13.36 U14.36
RESET_OUT#4: U17.36 U18.36
RESET_OUT#5: U21.36 U22.36
RESET_OUT#6: U25.36 U26.36
RESET_OUT#7: U29.36 U30.36
RESET_OUT#8: U33.36 U34.36
RESET_OUT#9: U37.36 U38.36
USB_DN: U2.18 U3.18
USB_DN1: U5.18 U6.18
USB_DN2: U9.18 U10.18
USB_DN3: U13.18 U14.18
USB_DN4: U17.18 U18.18
USB_DN5: U21.18 U22.18
USB_DN6: U25.18 U26.18
USB_DN7: U29.18 U30.18
USB_DN8: U33.18 U34.18
USB_DN9: U37.18 U38.18
USB_DP: U2.16 U3.16
USB_DP1: U5.16 U6.16
USB_DP2: U9.16 U10.16
USB_DP3: U13.16 U14.16
USB_DP4: U17.16 U18.16
USB_DP5: U21.16 U22.16
USB_DP6: U25.16 U26.16
USB_DP7: U29.16 U30.16
USB_DP8: U33.16 U34.16
USB_DP9: U37.16 U38.16
USB_ID: U2.3 U3.3
USB_ID1: U5.3 U6.3
USB_ID2: U9.3 U10.3
USB_ID3: U13.3 U14.3
USB_ID4: U17.3 U18.3
USB_ID5: U21.3 U22.3
USB_ID6: U25.3 U26.3
USB_ID7: U29.3 U30.3
USB_ID8: U33.3 U34.3
USB_ID9: U37.3 U38.3
USB_VBUS: U2.20 U3.20
USB_VBUS1: U5.20 U6.20
USB_VBUS2: U9.20 U10.20
USB_VBUS3: U13.20 U14.20
USB_VBUS4: U17.20 U18.20
USB_VBUS5: U21.20 U22.20
USB_VBUS6: U25.20 U26.20
USB_VBUS7: U29.20 U30.20
USB_VBUS8: U33.20 U34.20
USB_VBUS9: U37.20 U38.20
V_BAT_BKUP: U2.23 U3.23
V_BAT_BKUP1: U5.23 U6.23
V_BAT_BKUP2: U9.23 U10.23
V_BAT_BKUP3: U13.23 U14.23
V_BAT_BKUP4: U17.23 U18.23
V_BAT_BKUP5: U21.23 U22.23
V_BAT_BKUP6: U25.23 U26.23
V_BAT_BKUP7: U29.23 U30.23
V_BAT_BKUP8: U33.23 U34.23
V_BAT_BKUP9: U37.23 U38.23
VSYS: C4.2 JP2.9 SJ1.1 U2.2 U2.4 U2.6 U3.2 U3.4 U3.6
VSYS1: C9.2 JP4.9 SJ2.1 U5.2 U5.4 U5.6 U6.2 U6.4 U6.6
VSYS2: C14.2 JP6.9 SJ3.1 U9.2 U9.4 U9.6 U10.2 U10.4 U10.6
VSYS3: C19.2 JP8.9 SJ4.1 U13.2 U13.4 U13.6 U14.2 U14.4 U14.6
VSYS4: C24.2 JP10.9 SJ5.1 U17.2 U17.4 U17.6 U18.2 U18.4 U18.6
VSYS5: C29.2 JP12.9 SJ6.1 U21.2 U21.4 U21.6 U22.2 U22.4 U22.6
VSYS6: C34.2 JP14.9 SJ7.1 U25.2 U25.4 U25.6 U26.2 U26.4 U26.6
VSYS7: C39.2 JP16.9 SJ8.1 U29.2 U29.4 U29.6 U30.2 U30.4 U30.6
VSYS8: C44.2 JP18.9 SJ9.1 U33.2 U33.4 U33.6 U34.2 U34.4 U34.6
VSYS9: C49.2 JP20.9 SJ10.1 U37.2 U37.4 U37.6 U38.2 U38.4 U38.6

## Tracks (layer width: path | path; a pad name or v marks a point on that pad's centre or on a via)
1.8V  (via drill 0.33)
  Top 0.152: v31.77,37.57 31.19,38.15 | U4.6 31.04,38.3 31.19,38.15 | U1.5 21.41,44.05 v21.13,44.32 21.01,44.2 U1.6 | C1.2 31.47,35.18 v31.24,35.41 | C3.2 v17.65,43.94 | v28.6,55.88 29.72,55.88 31.09,54.51 U3.12 | 31.19,38.15 31.19,38.13 30.96,37.9 U4.5
  Bottom 0.152: JP1.9 27.76,29.9 27.76,32.46 29.97,34.67 31.24,34.67 | 33.53,37.21 34.54,37.21 35.69,38.35 35.69,40.01 33.43,42.27 33.43,54.05 32.97,54.51 32.94,54.51 U3.12 31.09,54.51 29.72,55.88 v28.6,55.88 27.64,55.88 21.13,49.38 v21.13,44.32 18.03,44.32 v17.65,43.94 | 33.53,37.21 32.13,37.21 v31.77,37.57 | 31.24,34.67 31.88,34.67 33.53,36.32 33.53,37.21 | v31.24,35.41 31.24,34.67
1.8V1  (via drill 0.33)
  Top 0.152: v62.76,37.57 62.18,38.15 | U8.6 62.03,38.3 62.18,38.15 | U7.5 52.4,44.05 v52.12,44.32 52,44.2 U7.6 | C6.2 62.46,35.18 v62.23,35.41 | C8.2 v48.64,43.94 | v59.59,55.88 60.71,55.88 62.08,54.51 U6.12 | 62.18,38.15 62.18,38.13 61.95,37.9 U8.5
  Bottom 0.152: JP3.9 58.75,29.9 58.75,32.46 60.96,34.67 62.23,34.67 | 64.52,37.21 65.53,37.21 66.67,38.35 66.67,40.01 64.41,42.27 64.41,54.05 63.96,54.51 63.93,54.51 U6.12 62.08,54.51 60.71,55.88 v59.59,55.88 58.62,55.88 52.12,49.38 v52.12,44.32 49.02,44.32 v48.64,43.94 | 64.52,37.21 63.12,37.21 v62.76,37.57 | 62.23,34.67 62.87,34.67 64.52,36.32 64.52,37.21 | v62.23,35.41 62.23,34.67
1.8V2  (via drill 0.33)
  Top 0.152: v93.75,37.57 93.17,38.15 | U12.6 93.02,38.3 93.17,38.15 | U11.5 83.39,44.05 v83.11,44.32 82.98,44.2 U11.6 | C11.2 93.45,35.18 v93.22,35.41 | C13.2 v79.63,43.94 | v90.58,55.88 91.69,55.88 93.07,54.51 U10.12 | 93.17,38.15 93.17,38.13 92.94,37.9 U12.5
  Bottom 0.152: JP5.9 89.74,29.9 89.74,32.46 91.95,34.67 93.22,34.67 | 95.5,37.21 96.52,37.21 97.66,38.35 97.66,40.01 95.4,42.27 95.4,54.05 94.94,54.51 94.92,54.51 U10.12 93.07,54.51 91.69,55.88 v90.58,55.88 89.61,55.88 83.11,49.38 v83.11,44.32 80.01,44.32 v79.63,43.94 | 95.5,37.21 94.11,37.21 v93.75,37.57 | 93.22,34.67 93.85,34.67 95.5,36.32 95.5,37.21 | v93.22,35.41 93.22,34.67
1.8V3  (via drill 0.33)
  Top 0.152: v124.74,37.57 124.15,38.15 | U16.6 124.01,38.3 124.15,38.15 | U15.5 114.37,44.05 v114.1,44.32 113.97,44.2 U15.6 | C16.2 124.44,35.18 v124.21,35.41 | C18.2 v110.62,43.94 | v121.56,55.88 122.68,55.88 124.05,54.51 U14.12 | 124.15,38.15 124.15,38.13 123.93,37.9 U16.5
  Bottom 0.152: JP7.9 120.73,29.9 120.73,32.46 122.94,34.67 124.21,34.67 | 126.49,37.21 127.51,37.21 128.65,38.35 128.65,40.01 126.39,42.27 126.39,54.05 125.93,54.51 125.91,54.51 U14.12 124.05,54.51 122.68,55.88 v121.56,55.88 120.6,55.88 114.1,49.38 v114.1,44.32 111,44.32 v110.62,43.94 | 126.49,37.21 125.09,37.21 v124.74,37.57 | 124.21,34.67 124.84,34.67 126.49,36.32 126.49,37.21 | v124.21,35.41 124.21,34.67
1.8V4  (via drill 0.33)
  Top 0.152: v155.73,37.57 155.14,38.15 | U20.6 154.99,38.3 155.14,38.15 | U19.5 145.36,44.05 v145.09,44.32 144.96,44.2 U19.6 | C21.2 155.42,35.18 v155.19,35.41 | C23.2 v141.6,43.94 | v152.55,55.88 153.67,55.88 155.04,54.51 U18.12 | 155.14,38.15 155.14,38.13 154.91,37.9 U20.5
  Bottom 0.152: JP9.9 151.71,29.9 151.71,32.46 153.92,34.67 155.19,34.67 | 157.48,37.21 158.5,37.21 159.64,38.35 159.64,40.01 157.38,42.27 157.38,54.05 156.92,54.51 156.9,54.51 U18.12 155.04,54.51 153.67,55.88 v152.55,55.88 151.59,55.88 145.09,49.38 v145.09,44.32 141.99,44.32 v141.6,43.94 | 157.48,37.21 156.08,37.21 v155.73,37.57 | 155.19,34.67 155.83,34.67 157.48,36.32 157.48,37.21 | v155.19,35.41 155.19,34.67
1.8V5  (via drill 0.33)
  Top 0.152: v31.77,124.94 31.19,125.53 | U24.6 31.04,125.68 31.19,125.53 | U23.5 21.41,131.42 v21.13,131.7 21.01,131.57 U23.6 | C26.2 31.47,122.56 v31.24,122.78 | C28.2 v17.65,131.32 | v28.6,143.26 29.72,143.26 31.09,141.88 U22.12 | 31.19,125.53 31.19,125.5 30.96,125.28 U24.5
  Bottom 0.152: JP11.9 27.76,117.27 27.76,119.84 29.97,122.05 31.24,122.05 | 33.53,124.59 34.54,124.59 35.69,125.73 35.69,127.38 33.43,129.64 33.43,141.43 32.97,141.88 32.94,141.88 U22.12 31.09,141.88 29.72,143.26 v28.6,143.26 27.64,143.26 21.13,136.75 v21.13,131.7 18.03,131.7 v17.65,131.32 | 33.53,124.59 32.13,124.59 v31.77,124.94 | 31.24,122.05 31.88,122.05 33.53,123.7 33.53,124.59 | v31.24,122.78 31.24,122.05
1.8V6  (via drill 0.33)
  Top 0.152: v62.76,124.94 62.18,125.53 | U28.6 62.03,125.68 62.18,125.53 | U27.5 52.4,131.42 v52.12,131.7 52,131.57 U27.6 | C31.2 62.46,122.56 v62.23,122.78 | C33.2 v48.64,131.32 | v59.59,143.26 60.71,143.26 62.08,141.88 U26.12 | 62.18,125.53 62.18,125.5 61.95,125.28 U28.5
  Bottom 0.152: JP13.9 58.75,117.27 58.75,119.84 60.96,122.05 62.23,122.05 | 64.52,124.59 65.53,124.59 66.67,125.73 66.67,127.38 64.41,129.64 64.41,141.43 63.96,141.88 63.93,141.88 U26.12 62.08,141.88 60.71,143.26 v59.59,143.26 58.62,143.26 52.12,136.75 v52.12,131.7 49.02,131.7 v48.64,131.32 | 64.52,124.59 63.12,124.59 v62.76,124.94 | 62.23,122.05 62.87,122.05 64.52,123.7 64.52,124.59 | v62.23,122.78 62.23,122.05
1.8V7  (via drill 0.33)
  Top 0.152: v93.75,124.94 93.17,125.53 | U32.6 93.02,125.68 93.17,125.53 | U31.5 83.39,131.42 v83.11,131.7 82.98,131.57 U31.6 | C36.2 93.45,122.56 v93.22,122.78 | C38.2 v79.63,131.32 | v90.58,143.26 91.69,143.26 93.07,141.88 U30.12 | 93.17,125.53 93.17,125.5 92.94,125.28 U32.5
  Bottom 0.152: JP15.9 89.74,117.27 89.74,119.84 91.95,122.05 93.22,122.05 | 95.5,124.59 96.52,124.59 97.66,125.73 97.66,127.38 95.4,129.64 95.4,141.43 94.94,141.88 94.92,141.88 U30.12 93.07,141.88 91.69,143.26 v90.58,143.26 89.61,143.26 83.11,136.75 v83.11,131.7 80.01,131.7 v79.63,131.32 | 95.5,124.59 94.11,124.59 v93.75,124.94 | 93.22,122.05 93.85,122.05 95.5,123.7 95.5,124.59 | v93.22,122.78 93.22,122.05
1.8V8  (via drill 0.33)
  Top 0.152: v124.74,124.94 124.15,125.53 | U36.6 124.01,125.68 124.15,125.53 | U35.5 114.37,131.42 v114.1,131.7 113.97,131.57 U35.6 | C41.2 124.44,122.56 v124.21,122.78 | C43.2 v110.62,131.32 | v121.56,143.26 122.68,143.26 124.05,141.88 U34.12 | 124.15,125.53 124.15,125.5 123.93,125.28 U36.5
  Bottom 0.152: JP17.9 120.73,117.27 120.73,119.84 122.94,122.05 124.21,122.05 | 126.49,124.59 127.51,124.59 128.65,125.73 128.65,127.38 126.39,129.64 126.39,141.43 125.93,141.88 125.91,141.88 U34.12 124.05,141.88 122.68,143.26 v121.56,143.26 120.6,143.26 114.1,136.75 v114.1,131.7 111,131.7 v110.62,131.32 | 126.49,124.59 125.09,124.59 v124.74,124.94 | 124.21,122.05 124.84,122.05 126.49,123.7 126.49,124.59 | v124.21,122.78 124.21,122.05
1.8V9  (via drill 0.33)
  Top 0.152: v155.73,124.94 155.14,125.53 | U40.6 154.99,125.68 155.14,125.53 | U39.5 145.36,131.42 v145.09,131.7 144.96,131.57 U39.6 | C46.2 155.42,122.56 v155.19,122.78 | C48.2 v141.6,131.32 | v152.55,143.26 153.67,143.26 155.04,141.88 U38.12 | 155.14,125.53 155.14,125.5 154.91,125.28 U40.5
  Bottom 0.152: JP19.9 151.71,117.27 151.71,119.84 153.92,122.05 155.19,122.05 | 157.48,124.59 158.5,124.59 159.64,125.73 159.64,127.38 157.38,129.64 157.38,141.43 156.92,141.88 156.9,141.88 U38.12 155.04,141.88 153.67,143.26 v152.55,143.26 151.59,143.26 145.09,136.75 v145.09,131.7 141.99,131.7 v141.6,131.32 | 157.48,124.59 156.08,124.59 v155.73,124.94 | 155.19,122.05 155.83,122.05 157.48,123.7 157.48,124.59 | v155.19,122.78 155.19,122.05
3.3V  (via drill 0.33)
  Top 0.152: C2.2 13.41,42.58 SJ1.3 13.41,45.92 24.08,56.59 v29.52,56.59 30.8,55.31 | 30.8,55.31 31.2,54.91 U3.10 | U3.8 30.8,55.31 | U3.8
  Top 0.254: SJ1.3 13.34,44.4
  Bottom 0.152: v29.52,56.59 30.8,55.31 | U3.10 | U3.10 31.2,54.91 30.8,55.31 | 30.8,55.31 U3.8 33.59,55.31 33.91,54.99 | U3.10 | U3.10 33.45,54.91 33.66,55.12
  Bottom 0.254: JP1.10 29.21,33.27 30.23,34.29 32.26,34.29 36.07,38.1 36.07,40.13 33.91,42.29 33.91,54.99
3.3V1  (via drill 0.33)
  Top 0.152: C7.2 44.4,42.58 SJ2.3 44.4,45.92 55.07,56.59 v60.5,56.59 61.79,55.31 | 61.79,55.31 62.19,54.91 U6.10 | U6.8 61.79,55.31 | U6.8
  Top 0.254: SJ2.3 44.32,44.4
  Bottom 0.152: v60.5,56.59 61.79,55.31 | U6.10 | U6.10 62.19,54.91 61.79,55.31 | 61.79,55.31 U6.8 64.58,55.31 64.9,54.99 | U6.10 | U6.10 64.43,54.91 64.64,55.12
  Bottom 0.254: JP3.10 60.2,33.27 61.21,34.29 63.25,34.29 67.06,38.1 67.06,40.13 64.9,42.29 64.9,54.99
3.3V2  (via drill 0.33)
  Top 0.152: C12.2 75.39,42.58 SJ3.3 75.39,45.92 86.06,56.59 v91.49,56.59 92.77,55.31 | 92.77,55.31 93.17,54.91 U10.10 | U10.8 92.77,55.31 | U10.8
  Top 0.254: SJ3.3 75.31,44.4
  Bottom 0.152: v91.49,56.59 92.77,55.31 | U10.10 | U10.10 93.17,54.91 92.77,55.31 | 92.77,55.31 U10.8 95.57,55.31 95.89,54.99 | U10.10 | U10.10 95.42,54.91 95.63,55.12
  Bottom 0.254: JP5.10 91.19,33.27 92.2,34.29 94.23,34.29 98.04,38.1 98.04,40.13 95.89,42.29 95.89,54.99
3.3V3  (via drill 0.33)
  Top 0.152: C17.2 106.38,42.58 SJ4.3 106.38,45.92 117.04,56.59 v122.48,56.59 123.76,55.31 | 123.76,55.31 124.16,54.91 U14.10 | U14.8 123.76,55.31 | U14.8
  Top 0.254: SJ4.3 106.3,44.4
  Bottom 0.152: v122.48,56.59 123.76,55.31 | U14.10 | U14.10 124.16,54.91 123.76,55.31 | 123.76,55.31 U14.8 126.56,55.31 126.87,54.99 | U14.10 | U14.10 126.41,54.91 126.62,55.12
  Bottom 0.254: JP7.10 122.17,33.27 123.19,34.29 125.22,34.29 129.03,38.1 129.03,40.13 126.87,42.29 126.87,54.99
3.3V4  (via drill 0.33)
  Top 0.152: C22.2 137.36,42.58 SJ5.3 137.36,45.92 148.03,56.59 v153.47,56.59 154.75,55.31 | 154.75,55.31 155.15,54.91 U18.10 | U18.8 154.75,55.31 | U18.8
  Top 0.254: SJ5.3 137.29,44.4
  Bottom 0.152: v153.47,56.59 154.75,55.31 | U18.10 | U18.10 155.15,54.91 154.75,55.31 | 154.75,55.31 U18.8 157.54,55.31 157.86,54.99 | U18.10 | U18.10 157.4,54.91 157.61,55.12
  Bottom 0.254: JP9.10 153.16,33.27 154.18,34.29 156.21,34.29 160.02,38.1 160.02,40.13 157.86,42.29 157.86,54.99
3.3V5  (via drill 0.33)
  Top 0.152: C27.2 13.41,129.96 SJ6.3 13.41,133.3 24.08,143.97 v29.52,143.97 30.8,142.68 | 30.8,142.68 31.2,142.28 U22.10 | U22.8 30.8,142.68 | U22.8
  Top 0.254: SJ6.3 13.34,131.78
  Bottom 0.152: v29.52,143.97 30.8,142.68 | U22.10 | U22.10 31.2,142.28 30.8,142.68 | 30.8,142.68 U22.8 33.59,142.68 33.91,142.37 | U22.10 | U22.10 33.45,142.28 33.66,142.49
  Bottom 0.254: JP11.10 29.21,120.65 30.23,121.67 32.26,121.67 36.07,125.48 36.07,127.51 33.91,129.67 33.91,142.37
3.3V6  (via drill 0.33)
  Top 0.152: C32.2 44.4,129.96 SJ7.3 44.4,133.3 55.07,143.97 v60.5,143.97 61.79,142.68 | 61.79,142.68 62.19,142.28 U26.10 | U26.8 61.79,142.68 | U26.8
  Top 0.254: SJ7.3 44.32,131.78
  Bottom 0.152: v60.5,143.97 61.79,142.68 | U26.10 | U26.10 62.19,142.28 61.79,142.68 | 61.79,142.68 U26.8 64.58,142.68 64.9,142.37 | U26.10 | U26.10 64.43,142.28 64.64,142.49
  Bottom 0.254: JP13.10 60.2,120.65 61.21,121.67 63.25,121.67 67.06,125.48 67.06,127.51 64.9,129.67 64.9,142.37
3.3V7  (via drill 0.33)
  Top 0.152: C37.2 75.39,129.96 SJ8.3 75.39,133.3 86.06,143.97 v91.49,143.97 92.77,142.68 | 92.77,142.68 93.17,142.28 U30.10 | U30.8 92.77,142.68 | U30.8